# Allegro board CUITBIKE_V1.2_MSP430.brd
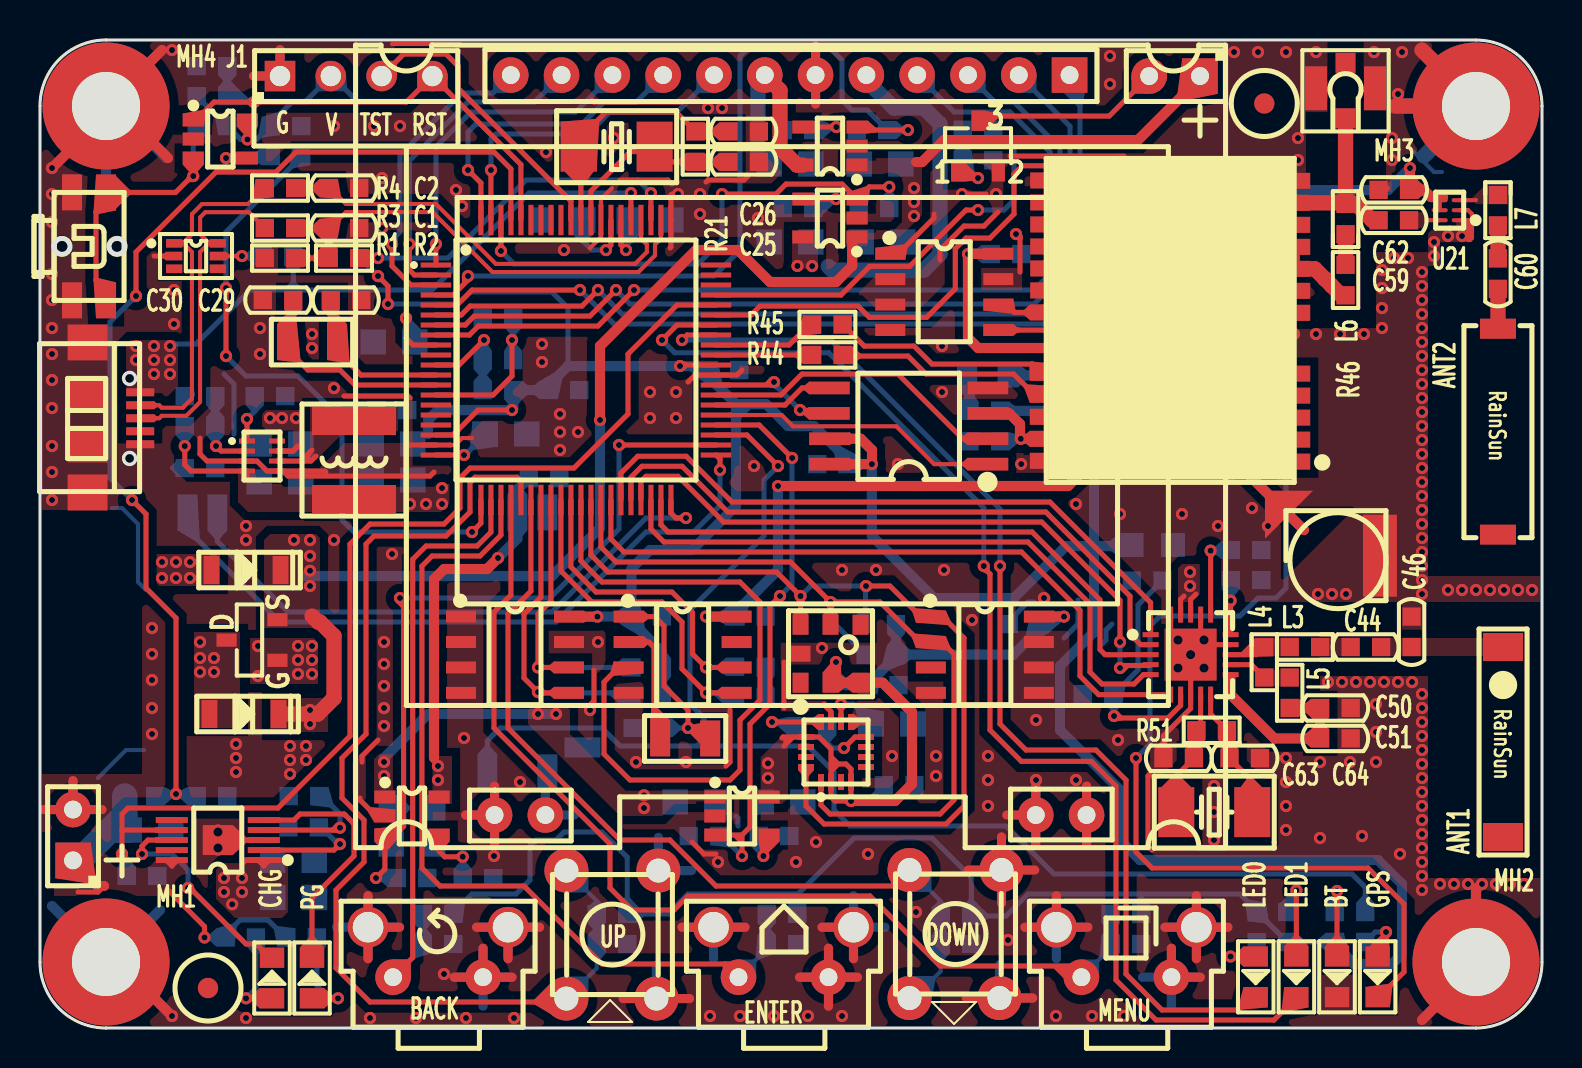
[diagram p0: board, top side]
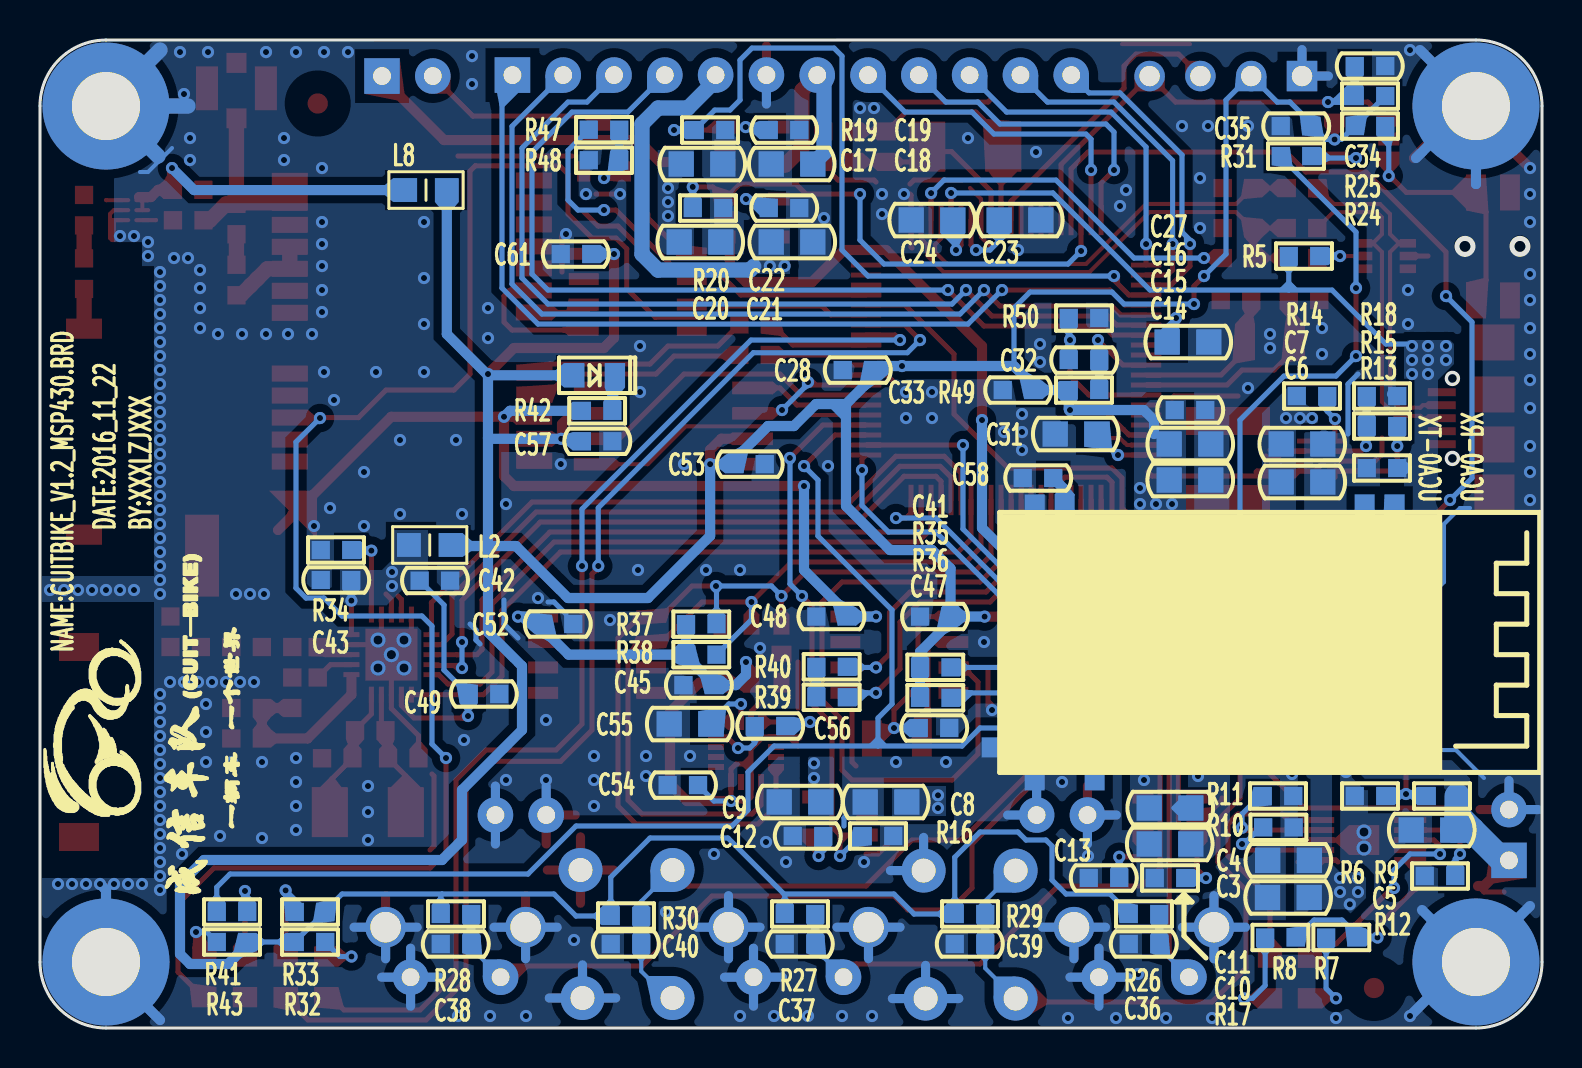
[diagram p1: board, bottom side, seen from below]

Outline 75.1 x 49.4 mm; copper layers: TOP, BOTTOM. Coordinates in mm from the lower left corner of the outline.
Outline path: 0,46.1 arc(0.97,48.44) 3.3,49.4 71.8,49.4 arc(74.13,48.43) 75.1,46.1 75.1,3.3 arc(74.13,0.97) 71.8,0 3.3,0 arc(0.97,0.97) 0,3.3 0,46.1

## Design rules (mm)
net group DP1: nets DM DP
net group DP2: nets D+ D-

## Placement (name value [footprint] x y rotation side)
ANT1  -  [AN9520-245]  73.15 19.05 270 top
ANT2  GPS1003-1575  [AN1003-1575]  72.9 29.72 270 top
B1  BEEP_HC12085P  [HEADER2X1_2R54]  58 47.6 180 top
BAT1  BATTERY  [HEADER2X1_2R54]  1.65 8.38 90 top
C1  10pF_50V  [CC0603]  15.2 40 180 top
C2  10pF_50V  [CC0603]  15.2 42 180 top
C3  10uF_25V  [CC0805]  12.68 6.53 0 bottom
C4  10uF_25V  [CC0805]  12.67 8.38 0 bottom
C5  10uF_25V  [CC0805]  5.5 9.9 0 bottom
C6  10uF_25V  [CC0805]  12 27.3 180 bottom
C7  10uF_25V  [CC0805]  12 29.2 180 bottom
C8  10uF_25V  [CC0805]  32.8 11.3 0 bottom
C9  10uF_25V  [CC0805]  37.1 11.3 0 bottom
C10  10uF_25V  [CC0805]  18.6 9.2 0 bottom
C11  10uF_25V  [CC0805]  18.6 11 180 bottom
C12  22nF_50V  [CC0603]  36.7 9.6 0 bottom
C13  22nF_50V  [CC0603]  21.9 7.5 0 bottom
C14  10uF_25V  [CC0805]  17.6 27.4 180 bottom
C15  10uF_25V  [CC0805]  17.6 29.2 180 bottom
C16  0.1uF_50V  [CC0603]  17.6 30.9 180 bottom
C17  10uF_25V  [CC0805]  42 43.2 180 bottom
C18  10uF_25V  [CC0805]  37.5 43.2 0 bottom
C19  22nF_50V  [CC0603]  37.9 44.9 180 bottom
C20  10uF_25V  [CC0805]  42.1 39.3 180 bottom
C21  10uF_25V  [CC0805]  37.5 39.3 180 bottom
C22  22nF_50V  [CC0603]  37.9 41 180 bottom
C23  10uF_25V  [CC0805]  26.1 40.4 0 bottom
C24  10uF_25V  [CC0805]  30.5 40.4 180 bottom
C25  20pF_50V  [CC0603]  35.18 43.31 180 top
C26  20pF_50V  [CC0603]  35.18 44.83 180 top
C27  10uF_25V  [CC0805]  17.7 34.3 180 bottom
C28  0.1uF_50V  [CC0603]  34.2 32.9 0 bottom
C29  12pF_50V  [CC0603]  15.3 36.4 180 top
C30  12pF_50V  [CC0603]  11.9 36.4 0 top
C31  10uF_25V  [CC0805]  23.3 29.7 0 bottom
C32  0.1uF_50V  [CC0603]  22.9 33.4 180 bottom
C33  0.1uF_50V  [CC0603]  26.2 31.9 180 bottom
C34  1nF_50V  [CC0603]  8.6 48.1 0 bottom
C35  0.1uF_50V  [CC0603]  12.3 45.1 180 bottom
C36  0.1uF_50V  [CC0603]  19.9 4.2 0 bottom
C37  0.1uF_50V  [CC0603]  37.1 4.2 0 bottom
C38  0.1uF_50V  [CC0603]  54.3 4.2 0 bottom
C39  0.1uF_50V  [CC0603]  28.6 4.2 0 bottom
C40  0.1uF_50V  [CC0603]  45.8 4.2 0 bottom
C41  0.1uF_50V  [CC0603]  30.34 20.57 0 bottom
C42  0.1uF_50V  [CC0603]  55.36 22.37 180 bottom
C43  0.1uF_50V  [CC0603]  60.3 22.4 180 bottom
C44  1.5pF_50V  [CC0603]  66.29 19.05 180 top
C45  0.1uF_50V  [CC0603]  42.16 17.14 180 bottom
C46  1pF_50V  [CC0603]  68.58 19.81 270 top
C47  12pF_50V  [CC0603]  30.4 15 180 bottom
C48  0.1uF_50V  [CC0603]  35.52 20.57 0 bottom
C49  0.1uF_50V  [CC0603]  52.9 16.7 0 bottom
C50  2.2nF_50V  [CC0603]  64.77 16 180 top
C51  4.7pF_50V  [CC0603]  64.77 14.48 180 top
C52  0.1uF_50V  [CC0603]  49.2 20.2 0 bottom
C53  0.1uF_50V  [CC0603]  39.62 28.19 180 bottom
C54  0.1uF_50V  [CC0603]  42.96 12.14 180 bottom
C55  10uF_25V  [CC0805]  42.6 15.2 0 bottom
C56  220nF_50V  [CC0603]  38.6 15.1 180 bottom
C57  0.1uF_50V  [CC0603]  47.24 29.34 180 bottom
C58  0.1uF_50V  [CC0603]  25.2 27.5 180 bottom
C59  8.2pF_50V  [CC0603]  67.69 40.39 180 top
C60  470pF_50V  [CC0603]  72.9 37.72 90 top
C61  0.1uF_50V  [CC0603]  48.3 38.7 0 bottom
C62  0.1uF_50V  [CC0603]  67.69 41.91 0 top
C63  20pF_50V  [CC0603]  56.93 13.49 0 top
C64  20pF_50V  [CC0603]  60.24 13.49 180 top
D1  LED_RED  [LED0805]  11.6 2.5 90 top
D2  LED_GREEN  [LED0805]  13.6 2.5 90 top
D3  LMBR120FT1G_SOD-123  [SOD-123]  8.6 15.7 0 top
D4  LMBR120FT1G_SOD-123  [SOD-123]  8.7 22.9 0 top
D5  LED_RED  [LED0805]  60.79 2.56 270 top
D6  LED_RED  [LED0805]  62.82 2.56 270 top
D7  LED_RED  [LED0805]  64.85 2.56 270 top
D8  LED_RED  [LED0805]  66.88 2.56 270 top
D9  RLS4148  [0805F]  47.37 32.64 180 bottom
IPX1  IPEX  [IPEX3]  65.28 46.99 0 top
J1  -  [HEADER4X1_2R54]  12 47.6 0 top
L1  SWPA5020S1R5MT  [L5020]  15.7 28.4 270 top
L2  BEAD_BLM21PG600  [LC0805]  55.61 24.15 0 bottom
L3  3.9nH  [LC0603]  63.25 19.05 0 top
L4  8.2nH  [LC0603]  61.21 18.29 90 top
L5  2.7nH  [LC0603]  62.48 16.76 270 top
L6  27nH  [LC0603]  65.28 40.45 270 top
L7  6.8nH  [LC0603]  72.9 40.89 90 top
L8  BEAD_BLM21PG600  [LC0805]  55.8 41.9 180 bottom
MH1  Hold  [HOLD250D134]  3.3 3.3 0 top
MH2  Hold  [HOLD250D134]  71.8 3.3 0 top
MH3  Hold  [HOLD250D134]  71.8 46.1 0 top
MH4  Hold  [HOLD250D134]  3.3 46.1 0 top
MP1  MarkPoint  [MARKPOINT_R3]  8.4 2 0 top
MP2  MarkPoint  [MARKPOINT_R3]  61.21 46.23 0 top
NOREF  -  []  3.5 0 90 top
NOREF#2  -  []  0 3.8 0 top
Q1  AO3401A_SOT23_PMOS  [SOT23_GSD]  10.6 19.4 90 top
Q2  S8050_SOT23_NPN  [SOT23_123]  46.9 44.1 0 top
R1  1M  [RC0603]  12 38.5 0 top
R2  1.5K  [RC0603]  15.2 38.5 0 top
R3  27R  [RC0603]  12 40 0 top
R4  27R  [RC0603]  12 42 0 top
R5  10K  [RC0603]  11.9 38.6 0 bottom
R6  200K  [RC0603]  8.6 11.6 180 bottom
R7  1.5K  [RC0603]  10.03 4.53 180 bottom
R8  1.5K  [RC0603]  13.08 4.53 180 bottom
R9  200K  [RC0603]  5 11.6 180 bottom
R10  1K  [RC0603]  13.18 10.03 180 bottom
R11  2K  [RC0603]  13.2 11.6 180 bottom
R12  10K  [RC0603]  5.1 7.6 0 bottom
R13  1K00  [RC0603]  8 28 0 bottom
R14  0R  [RC0603]  11.5 31.6 180 bottom
R15  200K  [RC0603]  8 30.1 0 bottom
R16  10K  [RC0603]  33.2 9.6 180 bottom
R17  10K  [RC0603]  18.6 7.5 0 bottom
R18  44.2K  [RC0603]  8 31.6 180 bottom
R19  10K  [RC0603]  41.6 44.9 180 bottom
R20  10K  [RC0603]  41.7 41 180 bottom
R21  1M  [RC0603]  32.77 44.07 90 top
R24  10K  [RC0603]  8.6 45.1 180 bottom
R25  47K  [RC0603]  8.6 46.6 0 bottom
R26  10K  [RC0603]  19.9 5.7 180 bottom
R27  10K  [RC0603]  37.1 5.7 180 bottom
R28  10K  [RC0603]  54.3 5.7 180 bottom
R29  10K  [RC0603]  28.6 5.7 180 bottom
R30  10K  [RC0603]  45.8 5.6 180 bottom
R31  0R  [RC0603]  12.3 43.6 0 bottom
R32  1K  [RC0603]  61.6 4.3 180 bottom
R33  1K  [RC0603]  61.6 5.8 0 bottom
R34  22K  [RC0603]  60.3 23.9 0 bottom
R35  4.7K  [RC0603]  30.34 18.03 180 bottom
R36  4.7K  [RC0603]  30.34 16.51 180 bottom
R37  4.7K  [RC0603]  42.04 20.19 180 bottom
R38  4.7K  [RC0603]  42.04 18.67 180 bottom
R39  4.7K  [RC0603]  35.52 16.54 180 bottom
R40  4.7K  [RC0603]  35.52 18.06 180 bottom
R41  510R  [RC0603]  65.5 5.8 180 bottom
R42  120R  [RC0603]  47.24 30.86 0 bottom
R43  510R  [RC0603]  65.5 4.3 0 bottom
R44  510R  [RC0603]  39.37 33.66 180 top
R45  510R  [RC0603]  39.37 35.18 180 top
R46  10R  [RC0603]  65.28 37.4 270 top
R47  1K  [RC0603]  46.9 44.92 180 bottom
R48  10K  [RC0603]  46.9 43.39 180 bottom
R49  0R  [RC0603]  22.9 31.9 0 bottom
R50  0R  [RC0603]  22.9 35.5 180 bottom
R51  1M  [RC0603]  58.59 14.89 180 top
SW1  SW-6X6x6-L  [SW-6X6X6-L]  17.65 2.54 0 top
SW2  SW-6X6x6-L  [SW-6X6X6-L]  34.92 2.54 0 top
SW3  SW-6X6x6-L  [SW-6X6X6-L]  52.07 2.54 0 top
SW4  SW-6X6x6  [SW-6X6X6]  28.62 4.67 0 top
SW5  SW-6X6x6  [SW-6X6X6]  45.77 4.7 0 top
SW6  SW-4P-5R4x4R5  [SW-4P-5R4X4R5]  3.3 41.78 270 top
U1  NUP4202W1T2G  [SC-88]  7.8 38.6 0 top
U2  BQ24090DGQR  [HVSSOP-10]  8.89 9.4 90 top
U3  MP2162GQH-Z  [QFN-8]  11.1 28.6 0 top
U4  RT9193-33GB  [SOT23-5]  18.6 10.6 270 top
U5  RT9193-33GB  [SOT23-5]  35.1 10.6 270 top
U6  RT9193-33GB  [SOT23-5]  39.5 44.1 90 top
U7  RT9193-33GB  [SOT23-5]  39.5 40.5 90 top
U8  MSP430F5529IPN  [LQFP-80]  26.8 33.4 270 top
U9  TPS3823-33DBVR  [SOT23-5]  9.02 44.45 270 top
U10  -  [BMP180]  38.03 17.27 0 top
U11  AT24C512C-SSHD-T  [SOIC8]  23.75 18.67 270 top
U12  NRF24L01P-R  [TQFN-4X4-20]  57.53 18.67 0 top
U13  TMP75AIDR  [SOIC8]  47.24 18.67 270 top
U14  PCF8563T  [SOIC8]  32.13 18.67 270 top
U15  -  [JLX12864G-086]  23.55 47.62 0 top
U16  HMC5883L  [TQFN-3X3-16]  39.8 13.8 0 top
U17  W25Q128FVSIG  [SO-8-208]  43.43 30.1 90 top
U18  HC-06  [HC-06-MINI]  7.37 25.78 270 bottom
U19  -  [NEO-6M]  62.61 28.32 180 top
U20  BATTERY_XH414  [BAT-XH414HG]  64.9 23.37 90 top
U21  MAX2659ELT+T  [UDFN-6]  70.48 40.89 180 top
U22  AT24C32D-SSHM-T  [SOIC8]  45.21 36.81 270 top
USB1  -  [USB-MICRO]  5.08 30.48 270 top
X1  XTAL_8MHz_5032  [X-2P-5R0X3R2-SMD]  28.83 44.07 0 top
X2  XTAL_32768Hz_3215  [X-2P-3R2X1R5-SMD]  13.6 34.3 0 top
X4  XTAL_32768Hz_3215  [X-2P-3R2X1R5-SMD]  32.26 14.48 180 top
X5  XTAL_16MHz_5032  [X-2P-5R0X3R2-SMD]  58.71 10.79 180 top

## Library data of the parts
ANT1 ANT2 = AN9520-245
B1 = BEEP_HC12085P
BAT1 U20 = BATTERY
C1 C2 C12 C13 C16 C19 C22 C25 C26 C28-C30 C32 C33 C36-C54 C56-C64 = CAP NP
C3-C11 C14 C15 C17 C18 C20 C21 C23 C24 C27 C31 C34 C35 C55 = CAP NP_2
D1 D2 D5-D8 = LED_4
D3 D4 = DIODE13_0
D9 = DIODE13_7
IPX1 = IPEX_1
J1 = CON4
L1 = IND_BEAD_0805_600OHM_1
L2 L8 = IND_BEAD_0805_600OHM_200MA
L3-L7 = INDUCTOR
MH1-MH4 = Hold_1
MP1 MP2 = MarkPoint
Q1 = MOS-P
Q2 = L14G1/TO_1
R1-R21 R24-R51 = R_Generic
SW1-SW6 = SWITCH-SPST-4P
U1 = nup2202w1_D_2
U2 = BQ24090
U3 = MP2162GQH-Z
U4-U7 = SPX3819M5-L-1-2
U8 = MSP430F5529
U9 = TPS3823-33_0
U10 = BMP180
U11 U22 = AT24Cxx
U12 = NRF24L01
U13 = LM75A
U14 = PCF8563
U15 = JLX12864G-086
U16 = HMC5883
U17 = W25Qxx
U18 = HC-06
U19 = NEO-6M
U21 = MAX2659ELT+T
USB1 = USB-MICRO
X1 X2 X4 X5 = XTAL_5032_0

## Footprints (pads in the part's own frame, mm; a bottom-side part is the same pattern mirrored in y, then rotated)
0805F
  rect 1.016x1.219 smd: 1(-1.016,0) 2(1.016,0)
AN1003-1575
  rect 1x1.8 smd: 1(-5.25,0) 2(5.05,0)
AN9520-245
  rect 1.4x2 smd: 1(0,0) 2(9.5,0)
BAT-XH414HG
  custom 2.4x2.4 smd: 1(2.3,2.45)
  rect 4.1x1.7 smd: 2(0.25,-2.1)
BMP180
  rect 0.8x1 smd: 1(0,0) 2(1.5,0) 3(3,0) 4(3,2.9) 5(1.5,2.9) 6(0,2.9)
  rect 1x0.8 smd: 7(0,1.45)
CC0603
  rect 0.914x0.914 smd: 1(-0.762,0) 2(0.762,0)
CC0805
  rect 1.27x1.27 smd: 1(-1.041,0) 2(1.041,0)
HC-06-MINI
  rect 1.8x1 smd: 1(0,0) 2(0,-1.5) 12(0,-16.5) 13(0,-18) 22(13,-18) 24(13,-15)
  rect 1x1.8 smd: 21(11.75,-19.75)
HEADER2X1_2R54
  rect 1.778x1.778 hole 0.889: 1(0,0)
  round 1.778 hole 0.889: 2(2.54,0)
HEADER4X1_2R54
  rect 1.524x1.524 hole 1.016: 1(0,0)
  round 1.524 hole 1.016: 2(2.54,0) 3(5.08,0) 4(7.62,0)
HOLD250D134
  round 6.35 hole 3.404: 1(0,0)
HVSSOP-10
  rect 0.3x1.6 smd: 1(-1,-2.3) 2(-0.5,-2.3) 3(0,-2.3) 4(0.5,-2.3) 5(1,-2.3) 6(1,2.3) 7(0.5,2.3) 8(0,2.3) 9(-0.5,2.3) 10(-1,2.3)
  rect 1.5x1.5 smd: 11(0,0)
IPEX3
  rect 1x1 smd: 1(0,-1.501) 3(0,1.27)
  rect 1.1x2.2 smd: 2(1.473,0) 4(-1.473,0)
JLX12864G-086
  rect 1.778x1.778 hole 0.889: 1(27.93,0.024)
  round 1.778 hole 0.889: 2(25.39,0.024) 3(22.85,0.024) 4(20.31,0.024) 5(17.77,0.024) 6(15.23,0.024) 7(12.69,0.024) 8(10.15,0.024) 9(7.61,0.024) 10(5.07,0.024) 11(2.53,0.024) 12(-0.01,0.024) 13(-0.82,-36.976) 14(1.72,-36.976) 15(26.24,-36.976) 16(28.78,-36.976)
L5020
  rect 1.4x4.2 smd: 1(-1.95,0) 2(1.95,0)
LC0603
  rect 0.914x0.914 smd: 1(-0.762,0) 2(0.762,0)
LC0805
  rect 1.194x1.194 smd: 1(-1.041,0) 2(1.041,0)
LED0805
  rect 1.016x1.219 smd: 1(-1.016,0) 2(1.016,0)
LQFP-80
  rect 0.25x1.52 smd: 1(-4.75,-7) 2(-4.25,-7) 3(-3.75,-7) 4(-3.25,-7) 5(-2.75,-7) 6(-2.25,-7) 7(-1.75,-7) 8(-1.25,-7) 9(-0.75,-7) 10(-0.25,-7) 11(0.25,-7) 12(0.75,-7) 13(1.25,-7) 14(1.75,-7) 15(2.25,-7) 16(2.75,-7) 17(3.25,-7) 18(3.75,-7) 19(4.25,-7) 20(4.75,-7) 41(4.75,7) 42(4.25,7) 43(3.75,7) 44(3.25,7) 45(2.75,7) 46(2.25,7) 47(1.75,7) 48(1.25,7) 49(0.75,7) 50(0.25,7) 51(-0.25,7) 52(-0.75,7) 53(-1.25,7) 54(-1.75,7) 55(-2.25,7) 56(-2.75,7) 57(-3.25,7) 58(-3.75,7) 59(-4.25,7) 60(-4.75,7)
  rect 1.52x0.25 smd: 21(7,-4.75) 22(7,-4.25) 23(7,-3.75) 24(7,-3.25) 25(7,-2.75) 26(7,-2.25) 27(7,-1.75) 28(7,-1.25) 29(7,-0.75) 30(7,-0.25) 31(7,0.25) 32(7,0.75) 33(7,1.25) 34(7,1.75) 35(7,2.25) 36(7,2.75) 37(7,3.25) 38(7,3.75) 39(7,4.25) 40(7,4.75) 61(-7,4.75) 62(-7,4.25) 63(-7,3.75) 64(-7,3.25) 65(-7,2.75) 66(-7,2.25) 67(-7,1.75) 68(-7,1.25) 69(-7,0.75) 70(-7,0.25) 71(-7,-0.25) 72(-7,-0.75) 73(-7,-1.25) 74(-7,-1.75) 75(-7,-2.25) 76(-7,-2.75) 77(-7,-3.25) 78(-7,-3.75) 79(-7,-4.25) 80(-7,-4.75)
MARKPOINT_R3
  round 1.016 smd: 1(0,0)
NEO-6M
  rect 1.8x0.8 smd: 1(0,0) 2(0,-1.1) 3(0,-2.2) 4(0,-3.3) 5(0,-4.4) 6(0,-7.44) 7(0,-8.54) 8(0,-9.64) 9(0,-10.74) 10(0,-11.84) 11(0,-12.94) 12(0,-14.04) 13(12.2,-14.06) 14(12.2,-12.96) 15(12.2,-11.86) 16(12.2,-10.76) 17(12.2,-9.66) 18(12.2,-8.56) 19(12.2,-7.46) 20(12.22,-4.44) 21(12.22,-3.34) 22(12.22,-2.24) 23(12.22,-1.14) 24(12.22,-0.04)
QFN-8
  rect 0.8x0.25 smd: 1(-0.75,0.75) 2(-0.75,0.25) 3(-0.75,-0.25) 4(-0.75,-0.75) 5(0.75,-0.75) 6(0.75,-0.25) 7(0.75,0.25) 8(0.75,0.75)
RC0603
  rect 0.914x0.914 smd: 1(-0.762,0) 2(0.762,0)
SC-88
  rect 0.813x0.432 smd: 1(-1.092,0.635) 2(-1.092,0) 3(-1.092,-0.635) 4(1.092,-0.635) 5(1.092,0) 6(1.092,0.635)
SO-8-208
  rect 0.635x2.032 smd: 1(-1.905,-3.962) 2(-0.635,-3.962) 3(0.635,-3.962) 4(1.905,-3.962) 5(1.905,3.962) 6(0.635,3.962) 7(-0.635,3.962) 8(-1.905,3.962)
SOD-123
  rect 0.8x1.4 smd: 1(-0.127,0) 2(3.327,0)
SOIC8
  rect 0.6x1.5 smd: 1(-1.9,-2.7) 2(-0.63,-2.7) 3(0.64,-2.7) 4(1.91,-2.7) 5(1.91,2.7) 6(0.64,2.7) 7(-0.63,2.7) 8(-1.9,2.7)
SOT23-5
  rect 0.65x1.06 smd: 1(-0.95,-1.354) 2(0,-1.354) 3(0.95,-1.354) 4(0.95,1.354) 5(-0.95,1.354)
SOT23_123
  rect 0.66x1.016 smd: 1(-1.016,-1.27) 2(1.016,-1.27) 3(0,1.27)
SOT23_GSD
  rect 0.66x1.016 smd: 1(-1.016,-1.27) 2(1.016,-1.27) 3(0,1.27)
SW-4P-5R4X4R5
  rect 1.8x1 smd: 1(0,0) 2(5.4,0) 3(0,-1.7) 4(5.4,-1.7)
SW-6X6X6
  round 2.2 hole 1.2: 1(-2.3,3.2) 2(-2.3,-3.2) 3(2.3,3.2) 4(2.2,-3.2)
SW-6X6X6-L
  round 2.032 hole 1.524: 1(-1.25,2.5) 4(5.75,2.5)
  round 1.778 hole 0.889: 2(0,0) 3(4.5,0)
TQFN-3X3-16
  rect 0.3x0.8 smd: 1(-0.75,-1.5) 2(-0.25,-1.5) 3(0.25,-1.5) 4(0.75,-1.5) 9(0.75,1.5) 10(0.25,1.5) 11(-0.25,1.5) 12(-0.75,1.5)
  rect 0.8x0.3 smd: 5(1.5,-0.75) 6(1.5,-0.25) 7(1.5,0.25) 8(1.5,0.75) 13(-1.5,0.75) 14(-1.5,0.25) 15(-1.5,-0.25) 16(-1.5,-0.75)
TQFN-4X4-20
  rect 0.8x0.25 smd: 1(-2,1) 2(-2,0.5) 3(-2,0) 4(-2,-0.5) 5(-2,-1) 11(2,-1) 12(2,-0.5) 13(2,0) 14(2,0.5) 15(2,1)
  rect 0.25x0.8 smd: 6(-1,-2) 7(-0.5,-2) 8(0,-2) 9(0.5,-2) 10(1,-2) 16(1,2) 17(0.5,2) 18(0,2) 19(-0.5,2) 20(-1,2)
  rect 2.6x2.6 smd: 21(0,0)
UDFN-6
  oval 0.8x0.2 smd: 1(-0.5,0.5) 2(-0.5,0) 3(-0.5,-0.5) 4(0.5,-0.5) 5(0.5,0) 6(0.5,0.5)
USB-MICRO
  rect 0.4x1.4 smd: 1(-1.31,-0.07) 2(-0.66,-0.07) 3(-0.01,-0.07) 4(0.64,-0.07) 5(1.29,-0.07)
  rect 1.8x2 smd: 6(-3.8,-2.7) 7(-1.2,-2.7) 8(1.3,-2.7) 9(3.7,-2.7)
X-2P-3R2X1R5-SMD
  rect 1x1.8 smd: 1(-1.25,0) 2(1.25,0)
X-2P-5R0X3R2-SMD
  rect 1.8x2.5 smd: 1(-1.9,0) 2(1.9,0)

## Nets
AVCC: C32.2 R49.1 U8.11(AVCC1)
GND: BAT1.2 C1.1 C2.1 C3.2 C4.2 C5.2 C6.2 C7.2 C8.2 C9.2 C10.2 C11.2 C12.2 C13.2 C14.2 C15.2 C16.2 C17.2 C18.2 C19.2 C20.2 C21.2 C22.2 C23.1 C24.1 C25.1 C26.1 C27.2 C28.2 C29.1 C30.1 C31.2 C33.1 C34.1 C35.1 C36.2 C37.2 C38.2 C39.2 C40.2 C41.2 C42.2 C43.1 C45.1 C46.1 C47.2 C48.2 C49.1 C50.1 C51.1 C52.1 C53.2 C54.1 C55.2 C57.2 C58.1 C61.2 C62.1 C63.1 C64.1 D7.2(CATHODE) IPX1.2 IPX1.4 J1.1 MH1.1 MH2.1 MH3.1 MH4.1 Q2.2(E) R1.1 R6.1 R10.2 R11.2 R12.2 R13.2 R16.2 R17.2 R18.2 R19.2 R20.2 R34.2 R48.1 R50.2 SW1.1 SW1.3 SW1.4 SW2.1 SW2.3 SW2.4 SW3.1 SW3.3 SW3.4 SW4.3 SW4.4 SW5.3 SW5.4 SW6.3 SW6.4 U1.2 U2.3(VSS) U2.11(GND) U3.3(AGND) U3.5(PGND) U4.2(GND) U5.2(GND) U6.2(GND) U7.2(GND) U8.19(DVSS1) U8.49(DVSS2) U8.61(VSSU) U8.68(AVSS2) U9.2(GND) U10.7(GND) U11.1(A0) U11.2(A1) U11.3(A2) U11.4(GND) U11.7(WP) U12.8(VSS_1) U12.14(VSS_2) U12.17(VSS_3) U12.20(VSS_4) U12.21(GND) U13.4(GND) U13.5(A2) U13.6(A1) U13.7(A0) U14.4(VSS) U15.6(VSS) U15.13(NC_4) U15.14(NC_3) U15.15(NC_2) U15.16(NC_1) U16.9(GND_1) U16.11(GND_2) U17.4(GND) U18.13(GND_1) U18.21(GND_2) U18.22(GND_3) U19.7(VDDUSB) U19.10(GND_1) U19.12(GND_2) U19.13(GND_3) U19.24(GND_4) U20.2 U21.1(GND_1) U21.2(GND_2) U22.1(A0) U22.2(A1) U22.3(A2) U22.4(GND) U22.7(WP) USB1.5(GND) USB1.6(P_2) USB1.7(P_1) USB1.8(P_3) USB1.9(P_4)
VBAT: BAT1.1 C5.1 D3.1 Q1.3(D) R7.2 R8.2 R9.2 U2.10(OUT)
VBUS: C3.1 C4.1 D4.1 Q1.1(G) R5.2 R13.1 U2.1(IN) U8.65(VBUS) USB1.1(VBUS)
VCC1_3V3: R39.1 R40.1
VCC_3V3: C14.1 C15.1 C16.1 C28.1 C33.2 C35.2 C41.1 C53.1 C57.1 C61.1 D9.1(ANODE) J1.2 L1.2(B) L2.1(A) L8.2(B) R15.1 R24.1 R25.1 R26.1 R27.1 R28.1 R29.1 R30.1 R32.1 R33.1 R35.1 R36.1 R43.1 R49.2 U3.4(OUT) U8.18(DVCC1) U8.50(DVCC2) U9.5(VCC) U11.8(VCC) U17.3(W\P\) U17.7(H\O\L\D\) U17.8(VCC) U19.23(VCC) U22.8(VCC)
VCC_BKUP: C48.1 R42.2 U14.8(VDD) U19.22(V_BCKP) U20.1
VCC_BT: C11.1 C58.2 U4.5(VOUT) U18.12(3.3V)
VCC_IN: B1.1(P) C6.1 C7.1 C8.1 C10.1 C17.1 C20.1 D3.2 D4.2 Q1.2(S) R14.1 U3.7(VIN) U4.1(VIN) U5.1(VIN) U6.1(VIN) U7.1(VIN)
VCC_LCD: C18.1 U6.5(VOUT) U15.7(VDD)
VCC_LEDA: C21.1 U7.5(VOUT) U15.5(LEDA)
VCC_SENSOR: C9.1 C45.2 C52.2 C54.2 R37.1 R38.1 U5.5(VOUT) U10.2(VDD) U10.3(VDDIO) U13.8(VCC) U16.2(VDD) U16.4(S1) U16.13(VDDIO)
VSSA: C32.1 R50.1 U8.14(AVSS1)
12864_CS: U8.3(P6.6/CB6/A6) U15.12(CS)
12864_EN: R19.1 U6.3(EN) U8.4(P6.7/CB7/A7)
12864_LEDA_EN: R20.1 U7.3(EN) U8.78(P6.1/CB1/A1)
12864_RESET: U8.2(P6.5/CB5/A5) U15.11(RESET)
12864_ROM_CS: U8.8(P7.3/CB11/A15) U15.4(ROM_CS)
12864_ROM_IN: U8.5(P7.0/CB8/A12) U15.1(ROM_IN)
12864_ROM_OUT: U8.6(P7.1/CB9/A13) U15.2(ROM_OUT)
12864_ROM_SCK: U8.7(P7.2/CB10/A14) U15.3(ROM_SCK)
12864_RS: U8.1(P6.4/CB4/A4) U15.10(RS)
12864_SCL: U8.79(P6.2/CB2/A2) U15.8(SCLK)
12864_SDA: U8.80(P6.3/CB3/A3) U15.9(SDA)
#RESET: C34.2 J1.4 R25.2 U8.76(R\S\T\/NMI/SBWTDIO) U9.1(R\E\S\E\T\)
ADC_BAT: R6.2 R9.1 U8.77(P6.0/CB0/A1)
AT24CXX_SCL: R35.2 U8.28(P1.7/TA1.0) U11.6(SCL)
AT24CXX_SDA: R36.2 U8.27(P1.6/TA1CLK/CBOUT) U11.5(SDA)
BAT_#CHG: D1.2(CATHODE) U2.8(C\H\G\)
BAT_#PG: D2.2(CATHODE) U2.5(P\G\)
BAT_ISET2: R12.1 U2.7(ISET2) U8.56(P5.7/TB0.1)
BEEP: R47.1 U8.57(P7.4/TB0.2)
BT_EN: R17.1 U4.3(EN) U8.42(P3.5/TB0.5)
BT_LED: R41.1 U8.43(P3.6/TB0.6) U18.24(PIO1)
D+: R3.1 U1.6 USB1.3(D+)
D-: R4.1 U1.1 USB1.2(D-)
DM: C2.2 R4.2 U8.64(PU.1/DM)
DP: C1.2 R1.2 R2.1 R3.2 U8.62(PU.0/DP)
GPS_PPS: D8.2(CATHODE) U8.55(P5.6/TB0.0) U19.3(TIMEPULSE)
GPS_SCL: U19.19(SCL2) U22.6(SCL)
GPS_SDA: U19.18(SDA2) U22.5(SDA)
IIC1_SCL: R38.2 U8.33(P2.4/TA2.1) U10.5(SCL) U13.2(SCL) U16.1(SCL)
IIC1_SDA: R37.2 U8.32(P2.3/TA2.0) U10.6(SDA) U13.1(SDA) U16.16(SDA)
NRF24L01_CE: U8.35(P2.6/RTCCLK/DMAE0) U12.1(CE)
NRF24L01_CSN: U8.36(P2.7/UCB0STE/UCA0CLK) U12.2(CSN)
NRF24L01_IRQ: U8.34(P2.5/TA2.2) U12.6(IRQ)
NRF24L01_MISO: U8.38(P3.1/UCB0SOMI/UCB0SCL) U12.5(MISO)
NRF24L01_MOSI: U8.37(P3.0/UCB0SIMO/UCB0SDA) U12.4(MOSI)
NRF24L01_SCK: U8.39(P3.2/UCB0CLK/UCA0STE) U12.3(SCK)
P1.0: R31.2 U8.21(P1.0/TA0CLK/ACLK)
P1.1: C36.1 R26.2 SW1.2 U8.22(P1.1/TA0.0)
P1.2: C37.1 R27.2 SW2.2 U8.23(P1.2/TA0.1)
P1.3: C38.1 R28.2 SW3.2 U8.24(P1.3/TA0.2)
P1.4: C39.1 R29.2 SW4.1 SW4.2 U8.25(P1.4/TA0.3)
P1.5: C40.1 R30.2 SW5.1 SW5.2 U8.26(P1.5/TA0.4)
P4.6: D5.2(CATHODE) U8.53(P4.6/PM_NONE)
P4.7: D6.2(CATHODE) U8.54(P4.7/PM_NONE)
PCF8563_#INT: U8.31(P2.2/TA2CLK/SMCLK) U14.3(I\N\T\)
PCF8563_SCL: R40.2 U8.30(P2.1/TA1.2) U14.6(SCL)
PCF8563_SDA: R39.2 U8.29(P2.0/TA1.1) U14.5(SDA)
SENSOR_EN: R16.1 U5.3(EN) U8.44(P3.7/TBOUTH/SVMOUT)
TEST: J1.3 U8.71(TEST/SBWTCK)
UCA0RXD: U8.41(P3.4/UCA0RXD/UCA0SOMI) U18.1(UART_TXD)
UCA0TXD: U8.40(P3.3/UCA0TXD/UCA0SIMO) U18.2(UART_RXD)
UCA1RXD: R45.2 U8.52(P4.5/PM_UCA1RXD/PM_UCA1SOMI)
UCA1TXD: R44.2 U8.51(P4.4/PM_UCA1TXD/PM_UCA1SIMO)
USB_PUR: R2.2 U8.63(PUR)
W25QXX_#CS: U8.45(P4.0/PM_UCB1STE/PM_UCA1CLK) U17.1(C\S\)
W25QXX_SPI_CLK: U8.48(P4.3/PM_UCB1CLK/PM_UCA1STE) U17.6(CLK)
W25QXX_SPI_MISO: U8.47(P4.2/PM_UCB1SOMI/PM_UCB1SCL) U17.2(DO)
W25QXX_SPI_MOSI: U8.46(P4.1/PM_UCB1SIMO/PM_UCB1SDA) U17.5(DI)
XIN: C29.2 U8.12(P5.4/XIN) X2.2
XOUT: C30.2 U8.13(P5.5/XOUT) X2.1
XT2IN: C25.2 R21.1 U8.69(P5.2/XT2IN) X1.2
XT2OUT: C26.2 R21.2 U8.70(P5.3/XT2OUT) X1.1
N16975: C47.1 U14.1(OSCI) X4.1
N20495: R34.1 U12.16(IREF)
N20883: C63.2 R51.2 U12.9(XC2) X5.2
N20890: C64.2 R51.1 U12.10(XC1) X5.1
N21363: C42.1 C43.2 C49.2 L2.2(B) U12.7(VDD_1) U12.15(VDD_2) U12.18(VDD_3) U12.19(DVDD)
N22760: L3.1 L4.2 U12.13(ANT2)
N22769: L4.1 L5.1 U12.12(ANT1)
N22838: C50.2 C51.2 L5.2 U12.11(VDD_PA)
N23293: ANT1.1 C44.1 C46.2
N49336: C31.1 U8.20(VCORE)
N50234: C23.2 U8.67(V18)
N138675: R44.1 U19.21(RXD1)
N138679: R45.1 U19.20(TXD1)
N211268: C24.2 U8.66(VUSB)
N213516: C59.2 IPX1.1 L6.1 U19.11(RF_IN)
N227281: C44.2 L3.2
N13728785: R10.1 U2.2(ISET)
N13728792: R11.1 U2.4(PRETERM)
N13730609: R14.2 U3.1(EN)
N13730742: L1.1(A) U3.6(SW)
N13730860: R15.2 R18.1 U3.2(FB)
N13731687: D2.1(ANODE) R8.1
N13731822: D1.1(ANODE) R7.1
N16749524: R5.1 U1.5
N16751988: R24.2 SW6.1 SW6.2 U9.3(M\R\)
N16752139: R31.1 U9.4(WDI)
N16756953: C27.1 U8.9(P5.0/A8/VREF+/VEREF+)
N16761282: D5.1(ANODE) R32.2
N16761286: D6.1(ANODE) R33.2
N16762618: C56.1 U16.8(SETP)
N16762626: C56.2 U16.12(SETC)
N16762634: C55.1 U16.10(C1)
N16777984: C12.1 U5.4(BYP)
N16778902: C19.1 U6.4(BYP)
N16779252: C22.1 U7.4(BYP)
N16779614: C13.1 U4.4(BYP)
N16780565: D7.1(ANODE) R41.2
N16782209: D8.1(ANODE) R43.2
N16782513: D9.2(CATHODE) R42.1
N16783927: R46.2 U19.8(NC_2) U19.9(VCC_RF)
N16783979: L6.2 R46.1
N16784737: ANT2.1 C60.1
N16784761: C60.2 L7.1
N16784764: L7.2 U21.3(RFIN)
N16785800: C59.1 U21.6(RFOUT)
N16785818: C62.2 L8.1(A) U21.4(VCC) U21.5(S\H\D\N\)
N16789326: U14.2(OSCO) X4.2
N16798201: Q2.1(B) R47.2 R48.2
N16798223: B1.2(G) Q2.3(C)

Pads without a net: ANT1 2; ANT2 2; IPX1 3; MP1 1; MP2 1; U1 3 4; U2 6 9; U3 8; U8 10 15 16 17 58 59 60 72 73 74 75; U10 1 4; U13 3; U14 7; U16 3 5 6 7 14 15; U19 1 2 4 5 6 14 15 16 17; USB1 4

## Via types
v1: diameter 0.61, hole 0.305, TOP to BOTTOM, 419 vias
v2: diameter 0.762, hole 0.457, TOP to BOTTOM, 7 vias

## Routing (per net, layer and track width the routed paths; a pad name or vN(x,y) marks a point on that pad's centre or on a via; arc(x,y) is an arc through that point)
AVCC: length 5.4
  TOP w0.254: v1(22.2,34.4) 20.95,33.15 U8.11
  BOTTOM w0.254: R49.1 C32.2 22.2,33.46 v1(22.2,34.4)
GND: length 346.3
  TOP w0.203: C62.1 67.31,41.91 67.4,42 ; 71.6,40.4 71.6,39.5 71.5,39.4 71.4,39.4 71.4,40.29 71.5,40.39 ; 71.6,40.4 71.59,40.39 71.5,40.39 ; 71.6,40.4 71.6,40.7 71.41,40.89 U21.2 ; 17.6,49.2 21,49.2 ; U8.19 20.75,29.15 20.86,29.26 20.87,29.26 21.11,29.5 21.6,29.5 ; 27.5,39 28.05,39.55 U8.68 28.05,41.45 28.6,42 ; U21.1 71.5,40.39
  TOP w0.254: 16.9,14.4 16.1,13.6 16.1,13.3 ; 14.3,27.8 14.25,27.85 12.15,27.85 ; 44.7,40.7 44.7,40.5 42.91,38.71 U22.1 ; U12.17 58.03,19.17 ; 58.03,19.17 U12.14 ; 58.03,19.17 v2(57.53,18.67) ; 48.5,43.6 54.2,43.6 ; 33.8,8.7 33.2,8.7 32.6,9.3 ; 12.15,27.85 12.4,27.6 19.5,27.6 19.7,27.8 ; 12.15,27.85 U3.5 11.35,27.85 10.85,28.35 U3.3 8.35,28.35 8,28.7 8,29.5 ; 49,39.5 49,39.6 48.9,39.6 ; 49,39.5 49,37.8 ; 49,39.5 48.9,39.6 ; 45,38.4 45,38.9 46.2,40.1 47.2,40.1 47.9,40.8 ; 41.3,15.4 41.2,15.3 U16.9 ; 35.1,32.9 34.85,32.65 U8.49 32.75,32.65 32.4,32.3 ; 37.2,18.3 37.2,16 ; v2(57.53,18.67) U12.8 57.53,15.98 56.17,14.62 C63.1 ; v2(57.53,18.67) 56.53,19.67 U12.20 ; U4.2 16.8,10.6 16,11.4 16,11.5 ; 31.5,39 31.55,39.05 U8.61 31.55,41.65 31.6,41.7 ; 46.4,41.7 47.3,41.7 ; 39.2,16.2 39.2,16.17 39.53,15.84 39.53,15.82 39.55,15.8 U16.11 ; 29,42.4 31.4,42.4 31.6,42.2 ; U1.2 5.7,38.6 ; 55.5,12.7 55.4,12.6 55.4,9.1 55.6,8.9 ; 18.5,31.5 18.4,31.6 15.2,31.6 ; U2.3 U2.11 ; 34.5,15.9 34.5,13.3 34.3,13.1 ; 27.7,17.9 27.7,16.1 v1(27.5,15.9) ; 48.9,39.6 v1(48.8,39.7) ; 32.1,46.3 27.7,46.3 27.6,46.4 ; 33.3,42.3 33.4,42.4 35.2,42.4 35.4,42.6 ; U8.19 18.45,29.15 18.4,29.2
  TOP w0.457: 52.33,9.2 U15.16 52.33,12.1 ; 39.42,1.09 SW2.3 ; SW2.3 40.87,2.54 ; SW2.3 37.98,2.54 ; SW2.3 39.42,3.99 ; 56.24,5.04 SW3.4 ; SW3.4 57.82,6.62 ; SW3.4 57.82,3.46 ; SW3.4 59.4,5.04 ; 49.24,5.04 SW3.1 ; SW3.1 50.82,6.62 ; SW3.1 52.4,5.04 ; 48.08,7.9 49.73,7.9 ; 48.08,7.9 46.42,7.9 ; 48.08,7.9 48.08,6.24 ; 48.08,7.9 48.08,9.56 ; SW1.3 23.6,2.54 ; SW1.3 20.7,2.54 ; SW1.3 22.15,3.99 ; SW1.4 24.98,5.04 ; SW1.4 23.4,3.46 ; SW1.4 21.83,5.04 ; 16.4,3.46 SW1.1 ; SW1.1 16.4,6.62 ; SW1.1 17.98,5.04 ; BAT1.2 3.1,10.92 ; BAT1.2 0.2,10.92 ; BAT1.2 1.65,12.37 ; U15.13 22.73,12.1 ; U15.13 21.28,10.65 ; U15.13 22.73,9.2 ; 48.34,10.65 U15.15 ; U15.15 49.79,9.2 ; U15.15 49.79,12.1 ; 32.48,1.47 SW4.4 29.16,1.47 ; 56.57,3.99 SW3.3 58.02,2.54 ; 38.78,49.1 U15.6 38.78,46.2 ; 12,48.92 J1.1 10.68,47.6 ; 40.67,3.46 SW2.4 39.1,5.04 ; 46.32,1.5 49.63,1.5 ; 32.1,5.04 SW2.1 35.25,5.04
  TOP w0.508: MH4.1 3.8,46.1 6.4,43.5 ; MH4.1 3.3,46.1 6.1,48.9 ; MH4.1 3.3,45.7 v1(0.6,43) ; 71.8,7 MH2.1 71.8,3.1 69.1,0.4 ; v1(6.6,0.6) 3.9,3.3 MH1.1
  TOP w0.762: 67.8,46.1 MH3.1 71.8,46.2 69.1,48.9
  BOTTOM w0.203: 5.2,13.9 4.3,13.9 2.9,12.5 ; 70.1,42.8 69.7,42.8 68.5,44 ; 5.3,21.9 4.9,22.3 4.9,25.2 4.1,26 3.6,26
  BOTTOM w0.254: 51.9,21.4 51.9,20.2 51.2,19.5 ; 53.6,20.2 53.3,19.9 53.3,19.4 53.1,19.2 ; C11.2 18.4,11 ; 49.7,21.3 49.4,21.3 48.8,20.7 ; 34.8,10.6 34.9,10.5 34.9,10.1 ; 9.7,29.7 9.7,32.2 9.2,32.7
  BOTTOM w0.457: SW2.1 35.25,5.04 ; SW2.1 33.67,3.46 ; SW2.1 32.1,5.04 ; 20.7,2.54 SW1.3 ; SW1.3 22.15,3.99 ; SW1.3 22.15,1.09 ; SW1.3 23.6,2.54 ; 47.98,1.5 47.98,3.16 ; 47.98,1.5 49.63,1.5 ; 47.98,1.5 46.32,1.5 ; 55.12,2.54 SW3.3 ; SW3.3 56.57,3.99 ; SW3.3 58.02,2.54 ; SW3.3 56.57,1.09 ; 23.4,3.46 SW1.4 ; SW1.4 24.98,5.04 ; SW1.4 21.83,5.04 ; 16.4,3.46 SW1.1 ; SW1.1 14.83,5.04 ; SW1.1 16.4,6.62 ; SW1.1 17.98,5.04 ; 37.98,2.54 SW2.3 ; SW2.3 39.42,1.09 ; SW2.3 40.87,2.54 ; SW2.3 39.42,3.99 ; 30.92,9.53 SW4.3 32.58,7.87 ; SW2.4 42.25,5.04 ; SW2.4 39.1,5.04 ; SW2.4 40.67,6.62 ; SW2.4 40.67,3.46 ; 25.27,12.1 U15.14 26.72,10.65 ; 49.24,5.04 SW3.1 ; SW3.1 52.4,5.04 ; SW3.1 50.82,3.46 ; SW4.4 32.48,1.47 ; SW4.4 29.16,1.47 ; SW4.4 30.82,3.13 ; 1.65,12.37 BAT1.2 0.2,10.92 ; 38.78,46.2 U15.6 ; 21.28,10.65 U15.13 22.73,9.2 ; 10.68,47.6 J1.1 12,48.92 ; 52.33,12.1 U15.16 52.33,9.2 ; SW3.4 59.4,5.04 ; SW3.4 57.82,3.46 ; SW3.4 56.24,5.04 ; U15.15 49.79,12.1
  BOTTOM w0.508: 6.3,43.5 3.7,46.1 MH4.1 ; MH4.1 3.3,46.1 6.1,48.9 ; MH4.1 3.3,42.2 3.3,42.2 ; v1(6.6,0.6) 3.9,3.3 3.4,3.3 ; 3.4,3.3 MH1.1 3.3,3.4 0.6,6.1 ; 3.4,3.3 6,5.9 ; v1(72.1,7.2) 71.8,6.9 MH2.1 71.8,3.1 69.1,0.4 ; R18.2 7.4,31.6 7.5,31.7
  BOTTOM w0.762: 67.7,46.1 71.7,46.1 ; 71.7,46.1 MH3.1 71.8,46.2 69.1,48.9 ; 71.7,46.1 69.2,43.6
  vias: v1(0.6,41.7) v1(0.6,40.3) v1(0.6,37.7) v1(0.6,36.4) v1(0.6,35) v1(0.6,33.7) v1(0.6,32.4) v1(0.6,31) v1(0.6,29.1) v1(0.6,27.8) v1(0.6,26.4) v1(5.6,20) v1(5.6,18.7) v1(5.6,17.4) v1(5.6,16) v1(5.6,14.7) v1(6.6,48.9) v1(6.7,36.9) v1(6.7,35.2) v1(9.8,14.2) v1(9.8,13.5) v1(9.8,12.8) v1(10.3,25.1) v1(10.3,24.4) v1(10.3,0.5) v1(11,35) v1(11,33.7) v1(12.5,14.1) v1(12.5,13.4) v1(12.5,12.7) v1(13.3,14.1) v1(13.3,13.4) v1(13.6,34.7) v1(13.6,34) v1(14.7,45.1) v1(14.7,32) v1(14.7,24.4) v1(16.5,0.5) v1(16.7,45.1) v1(17.1,42.5) v1(17.1,40) v1(17.2,19.3) v1(17.2,18.2) v1(17.2,17.1) v1(17.2,16) v1(17.2,15.1) v1(17.6,23.7) v1(18,45.1) v1(18.8,0.5) v1(20.2,2.7) v1(20.8,41.9) v1(21.1,41.1) v1(21.2,14.5) v1(21.3,0.5) v1(22.7,8.6) v1(23.7,0.5) v1(24,12.3) v1(25.1,34.2) v1(25.1,33.3) v1(25.3,43.8) v1(26,30.7) v1(26,29.8) v1(26,28.9) v1(26.2,38.9) v1(26.9,29.8) v1(27.9,19.3) v1(28.7,44.5) v1(29.8,13.3) v1(30.5,31.8) v1(30.5,30.5) v1(31.8,31.8) v1(31.8,30.5) v1(31.9,41.7) v1(32.3,13.3) v1(33,41.7) v1(33,40.7) v1(33.4,46) v1(33.5,0.6) v1(33.9,8.3) v1(34.1,46) v1(35,0.6) v1(35.7,28.1) v1(35.9,40.5) v1(36.7,0.6) v1(37.8,8.3) v1(38.4,0.6) v1(38.8,9.3) v1(39.1,19) v1(40.1,22.9) v1(40.1,0.6) v1(41.4,8.7) v1(41.8,22.9) v1(42.6,13.6) v1(42.9,28.2) v1(43.8,5.8) v1(44.8,13.6) v1(44.8,12.6) v1(45.1,34.1) v1(45.1,31.8) v1(45.2,22.9) v1(46.1,41.7) v1(46.6,20.4) v1(47.4,13.6) v1(47.4,12.4) v1(47.4,11.1) v1(47.8,41.7) v1(48.4,4.4) v1(49.06,28.2) v1(49.8,15.4) v1(49.8,12.4) v1(50.2,21.5) v1(50.8,0.6) v1(51.8,26.2) v1(51.8,12.4) v1(52.6,0.6) v1(52.7,36) v1(52.7,34.5) v1(53.5,48.6) v1(53.5,47.2) v1(53.9,14.4) v1(54,25.7) v1(54.2,0.6) v1(54.3,29.4) v1(55.9,40.3) v1(55.9,37.5) v1(55.9,35.2) v1(55.9,32.8) v1(57.1,29.4) v1(57.1,25.7) v1(58.3,32.8) v1(58.7,12.1) v1(58.7,10.8) v1(58.7,9.4) v1(58.9,27.8) v1(58.9,25.1) v1(59.7,48.8) v1(60.4,31.4) v1(60.6,26) v1(60.9,48.8) v1(60.9,32.8) v1(61,43) v1(61,40.3) v1(61,39.2) v1(61,38.1) v1(61,36.9) v1(61,35.8) v1(61.4,25.1) v1(61.5,34.7) v1(62.3,48.8) v1(62.3,13.5) v1(62.3,12.3) v1(62.3,11.1) v1(62.3,9.9) v1(62.7,34.7) v1(62.9,44.5) v1(62.9,43.4) v1(63.8,48.8) v1(63.8,34.7) v1(63.9,21.7) v1(64,13.3) v1(64,9.5) v1(64.4,17.3) v1(64.6,21.7) v1(65,34.7) v1(65.1,17.3) v1(65.3,21.7) v1(65.5,13.3) v1(65.8,17.3) v1(66.1,9.6) v1(66.2,34.7) v1(66.5,17.3) v1(66.7,48.8) v1(66.8,16.2) v1(66.8,14.8) v1(66.8,13.3) v1(67.1,37.9) v1(67.1,37) v1(67.1,36) v1(67.1,35) v1(67.2,17.3) v1(67.6,44.5) v1(67.6,43.4) v1(67.7,38.5) v1(67.9,46.7) v1(67.9,17.3) v1(68,8.7) v1(68.1,48.8) v1(68.4,38.5) v1(68.6,17.3) v1(69.1,37.8) v1(69.1,37.1) v1(69.1,36.4) v1(69.1,35.7) v1(69.1,35) v1(69.1,34.3) v1(69.1,33.6) v1(69.1,32.9) v1(69.1,32.2) v1(69.1,31.5) v1(69.1,30.8) v1(69.1,30.1) v1(69.1,29.4) v1(69.1,28.7) v1(69.1,28) v1(69.1,27.3) v1(69.1,26.6) v1(69.1,25.9) v1(69.1,25.2) v1(69.1,24.5) v1(69.1,23.8) v1(69.1,23.1) v1(69.1,22.4) v1(69.1,21.7) v1(69.1,16.7) v1(69.1,16) v1(69.1,15.3) v1(69.1,14.6) v1(69.1,13.9) v1(69.1,13.2) v1(69.1,12.5) v1(69.1,11.8) v1(69.1,11.1) v1(69.1,10.4) v1(69.1,9.7) v1(69.1,9) v1(69.1,8.3) v1(69.1,7.6) v1(69.1,6.9) v1(69.7,39.3) v1(69.7,38.6) v1(70,7.2) v1(70.4,39.6) v1(70.4,21.9) v1(70.7,7.2) v1(71.1,39.6) v1(71.1,21.9) v1(71.4,7.2) v1(71.8,21.9) v1(72.5,21.9) v1(72.8,7.2) v1(73.2,21.9) v1(73.5,7.2) v1(73.9,21.9) v1(74.2,7.2) v1(74.6,21.9) v2(8.9,9.8) v2(8.9,9) v2(56.9,19.4) v2(56.9,18) v2(58.2,19.4) v2(58.2,18)
VBAT: length 18.2
  TOP w0.203: 6.3,6.9 6.4,6.9
  TOP w0.254: 6.4,6.9 8.23,5.07 v1(8.23,4.53) ; 3.2,7.1 2.9,6.8 1.9,6.8 ; U2.10 6.59,8.11 6.6,8.1
  TOP w0.508: 3.2,7.1 2.9,7.1 1.65,8.35 BAT1.1
  BOTTOM w0.203: 9.27,4.53 v1(8.23,4.53)
  BOTTOM w0.254: 12.32,4.53 12.27,4.53 11.4,5.4 10,5.4 9.27,4.67 9.27,4.53
  BOTTOM w1.27: 4.24,10.64 3.5,9.9 ; 4.24,10.64 4.24,10.12 C5.1 3.5,9.9 ; 4.24,10.64 R9.2 ; 3.5,9.9 1.98,8.38 BAT1.1
  vias: v1(8,19.3) v1(8,18.5) v1(8,17.8) v1(8.7,18.5) v1(8.7,17.8)
VBUS: length 32.3
  TOP w0.254: 12.2,8.3 12.1,8.4 U2.1 ; 10.2,8.3 10.3,8.4 U2.1 ; 11.2,8.1 11.19,8.11 U2.1 ; U8.65 v1(29.55,41.75)
  BOTTOM w0.203: R13.1 6.6,28
  BOTTOM w0.254: v1(6.5,34.1) 6.6,34.2 7.8,34.2 10.5,36.9 12.66,36.9 ; 12.66,36.9 19.6,36.9 24.45,41.75 v1(29.55,41.75) ; 12.66,36.9 R5.2
  vias: v1(4.8,34.1) v1(4.8,33.4) v1(5.7,34.1) v1(5.7,33.4) v1(5.7,32.7) v1(6.1,23.3) v1(6.1,22.5) v1(6.5,33.4) v1(6.5,32.7) v1(6.8,23.3) v1(6.8,22.5) v1(7.5,23.3) v1(7.5,22.5) v1(9.2,7.5) v1(9.2,6.8) v1(9.61,6.19) v1(10.1,7.5) v1(10.1,6.8) v1(10.9,19.1) v1(10.9,17.6) v1(12.9,19.1) v1(12.9,18.4) v1(12.9,17.7) v1(13.6,19.1) v1(13.6,18.4) v1(13.6,17.7)
VCC1_3V3: length 1.5
  BOTTOM w0.508: R39.1 R40.1
VCC_3V3: length 262.7
  TOP w0.254: v1(16.9,37.6) 17.4,37.1 v1(17.4,36.2) ; 10.37,45.4 v1(10.37,44.43) ; 10.4,27.5 10.35,27.55 U3.4 7.55,27.85 7.24,28.16 v1(7.24,29.1) ; v1(23.6,30.9) 21.9,30.9 20.93,29.93 20.93,29.93 20.69,29.7 20.69,29.7 20.64,29.65 U8.18 ; U8.50 32.05,33.15 v1(32,33.1)
  TOP w0.508: 50.39,29.46 v1(49.04,29.46) 49,29.5 49,30.2 48.47,30.73 U17.3 ; U17.7 41.04,29.46 41.6,28.9 41.6,28.2 v1(41.59,28.19) U17.8 ; U11.8 v1(27.87,20.57) ; U22.8 46.41,38.71 v1(46.4,38.7) 46.4,34.51 46.91,34 51.4,34 v1(52.7,32.7)
  BOTTOM w0.254: R25.1 9.34,45.1 R24.1 10.03,44.43 v1(10.37,44.43) 10.83,44.43 11.5,45.1 C35.2 11.54,45.24 12.6,46.3 13.24,46.3 J1.2 14.6,47.6 15.8,46.4 15.8,38.7 v1(16.9,37.6) ; 55,6.7 49.4,6.7 48.3,5.6 R30.1 46.56,7.54 44.6,9.5 40.7,9.5 37.9,6.7 ; 55,6.7 60,6.7 60.84,5.86 R33.1 60.86,5.8 R32.1 R43.1 ; 55,6.7 55.06,6.64 R28.1 ; R15.1 v1(7.24,29.1) ; v1(17.4,36.2) 20.9,36.2 21.5,36.8 25.6,36.8 26.4,36 26.4,33.1 ; 37.9,6.7 32.4,6.7 31.4,5.7 R29.1 29.36,8.54 28.1,9.8 26.2,9.8 25.8,9.4 24.8,9.4 24.5,9.1 24.5,7.4 23.8,6.7 21.6,6.7 20.66,5.76 R26.1 ; 37.9,6.7 37.86,6.66 R27.1
  BOTTOM w0.508: L2.1 54.52,24.1 52.7,24.1 ; 52.7,29.5 52.7,32.64 ; 52.7,29.5 52.66,29.46 v1(49.04,29.46) 48.13,29.46 C57.1 ; 52.7,29.5 52.7,24.1 ; 52.7,32.64 v1(52.7,32.7) ; 52.7,32.64 54.76,34.7 L8.2 ; 52.7,32.64 D9.1 ; 52.7,24.1 52.7,19.8 51,18.1 51,14.9 54,11.9 54,9.4 55,8.4 66.9,8.4 68.1,7.2 68.1,3.7 67.6,3.2 65.7,3.2 64.74,4.16 R43.1 ; 52.7,24.1 51.3,24.1 48.7,21.5 44.7,21.5 41.59,24.61 v1(41.59,28.19) C53.1 40.39,28.41 38.7,30.1 37.4,30.1 36.3,31.2 34.8,31.2 ; v1(46.4,38.7) 46.41,38.71 47.52,38.71 C61.1 ; 34.8,31.2 34.8,26.1 32.6,23.9 30.5,23.9 29.57,22.97 C41.1 ; 34.8,31.2 33.44,32.56 C28.1 33.24,33.1 v1(32,33.1) 26.4,33.1 25.44,32.14 C33.2 R49.2 23.66,30.96 v1(23.6,30.9) 19.91,30.9 19.4,30.39 19.4,29.7 ; v1(27.87,20.57) 27.87,20.57 C41.1 ; C41.1 29.57,20.33 31.1,18.8 R35.1 R36.1
  vias: v1(18.5,26.2) v1(19.3,26.2) v1(20.1,27) v1(20.1,26.2)
VCC_BKUP: length 47.8
  TOP w0.508: v1(33.3,20.57) 33.3,20.57 U14.8 ; v1(51.9,30.56) 51.9,27.6 51.4,27.1 v1(36.9,27.1) ; v1(51.9,30.56) U19.22 ; v1(51.9,30.56) 57.54,30.56 62.43,25.67 U20.1 62.45,25.65 63.2,24.9
  BOTTOM w0.508: R42.2 51.6,30.86 v1(51.9,30.56) ; v1(36.9,27.1) 36.9,22.9 34.76,20.76 C48.1 v1(33.3,20.57)
VCC_BT: length 17.2
  TOP w0.508: 19.7,13.5 19.7,22.44 20.21,22.95 22.35,22.95 v1(22.9,23.5)
  BOTTOM w0.508: v1(22.9,23.5) 23.87,24.47 U18.12 23.87,26.93 C58.2
  vias: v1(19.9,13.1) v1(19.9,12.4)
VCC_IN: length 76.8
  TOP w0.28: 12.9,29.1 12.65,28.85 U3.7
  TOP w0.508: v1(28,30.4) 28,34.1 32.8,38.9 34.9,38.9 36.5,37.3 39.8,37.3 40.61,38.11 40.61,39.55 U7.1 ; 43.8,43.3 44.1,43.3 45.2,44.4 54.9,44.4 58,47.5 B1.1
  TOP w0.762: 13.6,20.6 13.9,20.3 14,20.3 14.7,19.6 14.7,16.5 13.9,15.7 D3.2
  BOTTOM w0.508: v1(25.8,15.7) v1(24.9,15.7) 19.4,15.7 17.2,13.5 v1(17.2,13.3) ; 13.2,22.6 25.6,22.6 28,25 v1(28,30.4)
  vias: v1(11.5,30.5) v1(12.1,30.5) v1(12.7,24.4) v1(12.8,30.5) v1(13.5,24.4) v1(13.5,23.6) v1(13.5,22.86) v1(13.5,22.1) v1(13.5,15.9) v1(13.5,15.2) v1(17.2,12.6) v1(30.2,11.64) v1(30.2,11) v1(43.7,42) v1(43.7,41.3) v1(43.7,40.6)
VCC_LCD: length 10.3
  TOP w0.762: U6.5 37.85,43.15 37,44 37,46.89 U15.7
  BOTTOM w0.762: C18.1 35.9,43.76 35.9,47.31 U15.7
VCC_LEDA: length 17.3
  BOTTOM w0.762: U15.5 41.32,47.38 42.7,46 44.2,46 45,45.2 45,38.7 44.2,37.9 39.6,37.9 39.41,38.09
  vias: v1(37.87,38.1) v1(38.61,38.1)
VCC_SENSOR: length 41
  TOP w0.254: 39.55,13.2 39.55,13.95 38.95,14.55 U16.13 37.65,14.55 ; 39.55,13.2 U16.2 39.55,11.55 39.75,11.35 v1(40.55,11.35) U16.4 40.55,12.95 40.3,13.2 39.55,13.2 ; 37.1,14.5 37.15,14.55 37.65,14.55 ; 37.65,14.55 37.2,14.1
  TOP w0.508: U13.8 v1(51.2,20.57) ; v1(39.8,18.3) 39.8,17.54 U10.2 U10.3 42.13,17.27 43.6,15.8 43.6,12.2 42.75,11.35 v1(40.55,11.35)
  BOTTOM w0.254: v1(40.55,11.35) 41.4,11.35 C54.2
  BOTTOM w0.508: v1(39.8,18.3) 39.8,17.65 40.31,17.14 C45.2 41.4,17.18 42.8,18.58 R38.1 ; R38.1 48.67,18.67 49.96,19.96 C52.2 50.33,20.57 v1(51.2,20.57) ; R38.1 R37.1
  vias: v1(36.4,13.24) v1(36.4,12.5)
VSSA: length 8.1
  TOP w0.254: U8.14 22.65,31.65 23.6,32.6 v1(23.6,34.4)
  BOTTOM w0.254: C32.1 23.6,33.46 v1(23.6,34.4) 23.66,34.46 R50.1
12864_CS: length 15.5
  TOP w0.254: U8.3 18.55,37.15 17.6,38.1 v1(17.6,39.2)
  BOTTOM w0.254: U15.12 22.65,46.76 21.1,46.76 18,43.65 18,39.8 17.6,39.4 v1(17.6,39.2)
12864_EN: length 40
  TOP w0.254: v1(21.4,37.6) 21.4,37.4 20.65,36.65 U8.4 ; U6.3 41,44.9 v1(43.4,44.9)
  BOTTOM w0.254: v1(21.4,37.6) 33.7,37.6 35,38.9 35,48.6 35.4,49 39.5,49 40.1,48.4 40.1,46.4 40.6,45.9 41.36,45.9 R19.1 v1(43.4,44.9)
12864_LEDA_EN: length 25.9
  TOP w0.254: v1(34.1,41.7) 36.8,41.7 37.3,42.2 40.1,42.2 U7.3 41.46,42.06 v1(42.46,42.06) ; U8.78 v1(23.05,38.85)
  BOTTOM w0.254: v1(34.1,41.7) 34.1,39.4 32.9,38.2 23.7,38.2 v1(23.05,38.85) ; v1(42.46,42.06) R20.1
12864_RESET: length 16.3
  TOP w0.254: v1(18.47,39.2) 18.47,37.91 18.72,37.65 U8.2
  BOTTOM w0.254: v1(18.47,39.2) 18.47,43.37 21.4,46.3 24.73,46.3 U15.11
12864_ROM_CS: length 46.3
  TOP w0.254: v1(29.7,36.9) 27.9,35.1 21.92,35.1 21.47,34.65 U8.8
  BOTTOM w0.254: U15.4 45.71,45.8 48.5,45.8 50.5,43.8 50.5,37.7 49.7,36.9 v1(29.7,36.9)
12864_ROM_IN: length 44.8
  TOP w0.254: v1(27,36.9) 21.6,36.9 20.85,36.15 U8.5
  BOTTOM w0.254: v1(27,36.9) 28.7,35.2 50.2,35.2 52,37 52,47.13 U15.1
12864_ROM_OUT: length 44.8
  TOP w0.254: v1(27.9,36.9) 27.1,36.1 21.51,36.1 21.06,35.65 U8.6
  BOTTOM w0.254: v1(27.9,36.9) 29.1,35.7 50,35.7 51.5,37.2 51.5,45.09 U15.2
12864_ROM_SCK: length 45.4
  TOP w0.254: v1(28.8,36.9) 27.5,35.6 21.71,35.6 21.27,35.15 U8.7
  BOTTOM w0.254: v1(28.8,36.9) 29.5,36.2 49.7,36.2 51,37.5 51,44 48.7,46.3 47.75,46.3 U15.3
12864_RS: length 16.2
  TOP w0.254: U8.1 v1(19.8,39.2)
  BOTTOM w0.254: v1(19.8,39.2) 19.8,44.05 21.55,45.8 26.77,45.8 U15.10
12864_SCL: length 16.5
  TOP w0.254: U8.79 v1(22.55,42.9)
  BOTTOM w0.254: U15.8 31.85,45.8 28.5,45.8 27.4,44.7 22.8,44.7 22.55,44.45 v1(22.55,42.9)
12864_SDA: length 15.6
  TOP w0.254: v1(21.4,42.9) 22.05,42.25 U8.80
  BOTTOM w0.254: v1(21.4,42.9) 21.4,44.8 21.8,45.2 27.1,45.2 28.2,46.3 29.81,46.3 U15.9
#RESET: length 24.9
  TOP w0.254: U8.76 24.05,43.17 J1.4 18.32,46.3 v1(10.7,46.3) 8.7,46.3 7.8,45.4 7.66,45.4
  BOTTOM w0.254: C34.2 R25.2 9.48,46.6 9.78,46.3 v1(10.7,46.3)
ADC_BAT: length 54.9
  TOP w0.254: v1(4.8,36.6) 4.8,38.8 8.8,42.8 11.8,42.8 12.8,43.8 22.7,43.8 23.55,42.95 U8.77 ; v1(4.6,26.4) 5.3,25.7 5.3,22 6.8,20.5 v1(6.8,11.7)
  BOTTOM w0.254: R6.2 7.74,11.7 v1(6.8,11.7) 5.86,11.7 R9.1 ; v1(4.6,26.4) 3.5,27.5 3.5,35.3 v1(4.8,36.6)
AT24CXX_SCL: length 14.9
  TOP w0.254: 25.55,26.4 25.55,21.35 24.9,20.7 v1(24.9,18.03) U11.6
  BOTTOM w0.254: v1(24.9,18.03) 29.57,18.03 R35.2
AT24CXX_SDA: length 16.6
  TOP w0.254: 25.05,26.4 25.05,21.55 24.2,20.7 24.2,17.5 v1(24.9,16.8) 24.94,16.76 U11.5
  BOTTOM w0.254: R36.2 29.32,16.76 24.94,16.76 v1(24.9,16.8)
BAT_#CHG: length 11.2
  TOP w0.254: v1(7.4,7) 7.5,7 10.3,4.2 10.81,4.2 11.5,3.52 D1.2 ; v1(5.1,8.7) 5.1,9.1 5.4,9.4 U2.8
  BOTTOM w0.254: v1(5.1,8.7) 6.6,8.7 7.4,7.9 v1(7.4,7)
BAT_#PG: length 12.4
  TOP w0.254: U2.5 12.7,10.4 13,10.7 15.2,10.7 15.25,10.65 15.26,10.65 15.63,10.28 15.63,10.27 15.7,10.2 15.7,8.6 13.6,6.5 D2.2
BAT_ISET2: length 54.2
  TOP w0.254: U8.56 31.85,36.15 29.4,33.7 29.4,30.7 26.7,28 21.5,28 21,27.5 21,26 20.2,25.2 16.5,25.2 15.5,24.2 15.5,14.6 11.9,11 4.4,11 4.1,10.7 4.1,9.9 ; 4.1,9.9 v1(4.1,8.7) ; 4.1,9.9 4.1,9.9 U2.7
  BOTTOM w0.254: R12.1 4.34,8.46 v1(4.1,8.7)
BEEP: length 20.8
  TOP w0.254: U8.57 40.05,36.65 41.48,38.08 43.48,38.08 46.3,40.9 v1(46.9,40.9)
  BOTTOM w0.254: R47.1 48.7,43.88 48.7,41.4 48.2,40.9 v1(46.9,40.9)
BT_EN: length 37.4
  TOP w0.254: v1(16.8,7.5) 17.25,7.95 U4.3 17.75,9.65 18.18,10.08 18.18,10.49 18.18,21.32 v1(18,21.5) ; U8.42 v1(28.95,29.15)
  BOTTOM w0.254: v1(28.95,29.15) 28.95,24.95 25.5,21.5 v1(18,21.5) ; v1(16.8,7.5) R17.1
BT_LED: length 71.3
  TOP w0.254: U8.43 35.35,29.65 v1(36.9,28.1)
  BOTTOM w0.254: v1(36.9,28.1) 36.2,27.4 36.2,24.6 32.5,20.9 32.5,16.2 33.2,15.5 33.2,14.1 ; R41.1 66.26,7.04 65.6,7.7 50.7,7.7 48.3,10.1 40.5,10.1 39.7,10.9 39.7,12.8 38.4,14.1 33.2,14.1 ; 33.2,14.1 29,14.1 28.1,15 23,15 22.37,14.37 U18.24
D+: length 17.1
  TOP w0.203: 8.46,39.23 8.01,39.69 8.01,40.53 8.27,40.79 10.44,40.79 R3.1 ; 8.46,39.23 U1.6 ; 8.46,39.23 8.44,39.23 8,38.8 8,31.3 7.31,30.61 6.08,30.61 5.96,30.49 USB1.3
D-: length 17.1
  TOP w0.203: 7.13,39.23 U1.1 ; 7.13,39.23 7.17,39.23 7.6,38.8 7.6,31.47 7.14,31.02 6.08,31.02 5.96,31.14 USB1.2 ; 7.13,39.23 7.6,39.7 7.6,40.7 8.1,41.2 10.4,41.2 11.2,42 R4.1
DM: length 21.1
  TOP w0.203: R4.2 C2.2 14.5,42 15.3,41.2 19.8,41.2 22.79,38.21 29.75,38.21 30.34,38.8 30.34,39.18 30.05,39.47 U8.64
DP: length 25
  TOP w0.203: U8.62 31.05,39.47 30.75,39.18 30.75,38.63 29.92,37.8 22.63,37.8 19.63,40.8 15.3,40.8 14.5,40 C1.2 ; C1.2 R3.2 ; C1.2 R2.1 R1.2
GPS_PPS: length 93.9
  TOP w0.254: v1(54.8,13.5) 54.8,8.8 55.6,8 66.4,8 68.2,6.2 68.2,2.8 66.94,1.54 D8.2 ; v1(61.1,30.5) 61.02,30.5 61,30.52 ; 61,30.52 U19.3 ; 61,30.52 59.18,30.52 57.8,31.9 54.4,31.9 53.6,32.7 53.6,42.85 53.33,43.11 49.11,43.11 48.7,42.7 48.7,40.7 47.5,39.5 46.3,39.5 45.77,38.96 45.77,36.97 44.33,35.53 41.47,35.53 40.9,36.1 36,36.1 35.55,35.65 U8.55
  BOTTOM w0.254: v1(54.8,13.5) 55.5,14.2 55.5,20.1 56,20.6 60,20.6 60.9,21.5 61.8,21.5 62.3,22 62.3,29.3 v1(61.1,30.5)
GPS_SCL: length 2.7
  TOP w0.254: U19.19 48.72,35.78 48.33,36.17 U22.6
GPS_SDA: length 7.1
  TOP w0.254: U22.5 48.92,34.9 48.92,34.9 51.5,34.9 51.9,35.3 51.9,36.6 51.62,36.88 U19.18
IIC1_SCL: length 42.3
  TOP w0.254: U16.1 39.05,11.15 39.5,10.7 45,10.7 45.7,11.4 45.7,18.7 45.1,19.3 U13.2 44,19.3 42,21.3 v1(39.53,21.3) ; 28.05,26.4 28.05,24.05 28.8,23.3 37.53,23.3 v1(39.53,21.3) ; v1(39.53,21.3) U10.5
  BOTTOM w0.254: v1(39.53,21.3) 39.53,20.42 R38.2
IIC1_SDA: length 45.9
  TOP w0.254: U10.6 v1(38.03,21.6) 36.83,22.8 28.4,22.8 27.55,23.65 27.55,26.4 ; v1(41.3,22.1) 42.5,22.1 44.03,20.57 U13.1 45.13,20.57 46.2,19.5 46.2,11.1 45.3,10.2 39.2,10.2 38.3,11.1 U16.16
  BOTTOM w0.254: v1(38.03,21.6) 38.53,22.1 v1(41.3,22.1) 41.27,22.07 R37.2
NRF24L01_CE: length 32.8
  TOP w0.254: U12.1 55.53,21.27 50.5,26.3 34.6,26.3 32.31,28.59 29.89,28.59 29.05,27.75 29.05,26.4
NRF24L01_CSN: length 32.2
  TOP w0.254: U12.2 55.03,19.17 54.5,19.7 54.5,21.59 50.29,25.8 34.39,25.8 32.11,28.09 30.09,28.09 29.55,27.54 29.55,26.4
NRF24L01_IRQ: length 35.1
  TOP w0.254: U12.6 52.93,16.67 52,17.6 52,20.88 49.08,23.8 29.2,23.8 28.55,24.45 28.55,26.4
NRF24L01_MISO: length 31.8
  TOP w0.254: 30.55,26.4 30.55,24.95 31.2,24.3 49.4,24.3 52.5,21.2 52.5,17.8 53.1,17.2 54.7,17.2 55.17,17.67 U12.5
NRF24L01_MOSI: length 32.5
  TOP w0.254: v1(54,19.3) 54,21.39 50.09,25.3 34.19,25.3 31.9,27.59 30.3,27.59 30.05,27.33 30.05,26.4 ; U12.4 55.49,18.13 54.13,18.13 v1(54,18)
  BOTTOM w0.254: v1(54,18) v1(54,19.3)
NRF24L01_SCK: length 29.9
  TOP w0.254: 31.05,26.4 31.05,25.16 31.41,24.8 49.61,24.8 53,21.41 53,18.92 53.25,18.67 53.43,18.67 53.44,18.66 54.26,18.66 54.27,18.67 U12.3
P1.0: length 32.2
  TOP w0.254: v1(9.3,37) v1(9.3,33.6) ; v1(21.6,24.8) 22.05,25.25 22.05,26.4
  BOTTOM w0.254: v1(9.3,33.6) 10.3,32.6 12.9,32.6 15.1,30.4 15.1,25.4 15.7,24.8 v1(21.6,24.8) ; R31.2 13.06,43.56 9.3,39.8 v1(9.3,37)
P1.1: length 31.2
  TOP w0.254: 22.55,26.4 22.55,24.79 21.85,24.1 19.3,24.1 18.64,23.44 18.64,3.52 SW1.2
  BOTTOM w0.203: SW1.2 19.14,4.03 C36.1 R26.2
P1.2: length 43.3
  TOP w0.254: SW2.2 34.27,3.2 28.1,3.2 24.2,7.1 20,7.1 19.09,8.01 19.09,23.09 19.6,23.6 22,23.6 23.05,24.65 23.05,26.4
  BOTTOM w0.203: R27.2 C37.1 36.34,3.95 SW2.2
P1.3: length 51.9
  TOP w0.254: 23.55,26.4 23.55,21.65 22.7,20.8 22.7,15 28.5,9.2 28.5,7 29.6,5.9 31.7,5.9 32.4,6.6 41.5,6.6 45,3.1 51.51,3.1 SW3.2
  BOTTOM w0.203: SW3.2 53.54,4.01 C38.1 R28.2
P1.4: length 53.7
  TOP w0.254: SW4.2 26.15,1.3 16.5,1.3 14.8,3 14.8,6.9 16.2,8.3 16.2,10.4 15.1,11.5 15.1,13.5 16.3,14.7 16.3,24.2 16.7,24.6 20.3,24.6 21.5,25.8 21.5,27.29 21.75,27.54 23.86,27.54 24.05,27.35 24.05,26.4
  BOTTOM w0.203: SW4.1 27.84,6.35 R29.2 C39.1 27.84,2.99 SW4.2
P1.5: length 43.5
  TOP w0.254: SW5.1 42.68,7.1 33.8,7.1 31.5,9.4 29,9.4 23.4,15 23.4,20.7 24.55,21.85 24.55,26.4
  BOTTOM w0.203: SW5.1 45.04,6.34 R30.2 C40.1 45.04,2.84 43.6,1.4 43.58,1.4 43.48,1.5
P4.6: length 56.6
  TOP w0.254: v1(32.1,34.4) 32.35,34.65 U8.53 ; D5.2 60.54,1.54 59.9,0.9 56.1,0.9 54.3,2.7 54.3,12.4 52.8,13.9 49.3,13.9 48,15.2 v1(48,23.1)
  BOTTOM w0.254: v1(48,23.1) 48,25.95 39.55,34.4 v1(32.1,34.4)
P4.7: length 61.3
  TOP w0.254: v1(31.1,34.4) 31.85,35.15 U8.54 ; D6.2 62.82,1.52 61.7,0.4 55.8,0.4 53.8,2.4 53.8,12.1 52.57,13.33 49.07,13.33 47.5,14.9 47.5,22.7 47.19,23.01 v1(47.19,23.1)
  BOTTOM w0.254: v1(47.19,23.1) 47.19,26.01 39.44,33.77 31.73,33.77 v1(31.1,34.4)
PCF8563_#INT: length 34.3
  TOP w0.254: U14.3 28.93,18.03 28.2,17.3 28.2,13.7 29.5,12.4 34.5,12.4 35,12.9 35,15.4 36,16.4 36,21.3 35,22.3 28.1,22.3 27.05,23.35 27.05,26.4
PCF8563_SCL: length 16.4
  TOP w0.254: 26.55,26.4 26.55,23.05 27.8,21.8 31.6,21.8 32.63,20.77 32.63,18.7 v1(33.3,18.03) U14.6
  BOTTOM w0.254: R40.2 34.72,18.03 v1(33.3,18.03)
PCF8563_SDA: length 17.8
  TOP w0.254: U14.5 v1(33.3,16.76) 32.1,17.96 32.1,20.3 31.1,21.3 27.6,21.3 26.05,22.85 26.05,26.4
  BOTTOM w0.254: R39.2 34.53,16.76 v1(33.3,16.76)
SENSOR_EN: length 28.3
  TOP w0.254: U8.44 35.96,30.15 v1(37.61,28.5) ; v1(37,21.6) 36.5,21.1 36.5,16.2 35.5,15.2 35.5,10.05 35.1,9.65 ; 35.1,9.65 U5.3 ; 35.1,9.65 v1(35.1,8.6)
  BOTTOM w0.254: v1(35.1,8.6) 34.1,9.6 R16.1 ; v1(37.61,28.5) 37.6,28.5 37.6,22.2 v1(37,21.6)
TEST: length 14.6
  TOP w0.254: J1.3 18.18,48.7 20.3,48.7 20.9,48.1 20.9,46.99 26.55,41.35 U8.71
UCA0RXD: length 34.4
  TOP w0.254: U8.41 34,28.45 v1(34,27.9)
  BOTTOM w0.254: v1(34,27.9) 34,26.13 32.67,24.8 30.3,24.8 25.8,20.3 12,20.3 7.37,24.93 U18.1
UCA0TXD: length 29.8
  TOP w0.254: 31.55,26.4 31.55,25.75 31.8,25.5 v1(32.3,25.5)
  BOTTOM w0.254: U18.2 8.87,24.33 12.4,20.8 25.6,20.8 30.3,25.5 v1(32.3,25.5)
UCA1RXD: length 5.2
  TOP w0.254: U8.52 37.45,34.15 38.48,35.18 R45.2
UCA1TXD: length 4.8
  TOP w0.254: R44.2 38.6,33.65 U8.51
USB_PUR: length 17.8
  TOP w0.254: v1(16.9,38.5) R2.2 ; U8.63 v1(30.55,41.75)
  BOTTOM w0.254: v1(16.9,38.5) 20.4,38.5 24.3,42.4 29.9,42.4 30.55,41.75 v1(30.55,41.75)
W25QXX_#CS: length 14.6
  TOP w0.203: U17.1 44.71,28.19 42.81,30.09 37.65,30.09 37.08,30.65 U8.45
W25QXX_SPI_CLK: length 6.4
  TOP w0.254: v1(36.7,32.3) 36.55,32.15 U8.48 ; v1(38,30.9) 38.1,30.8 39.41,30.8 U17.6
  BOTTOM w0.254: v1(38,30.9) 36.7,32.2 v1(36.7,32.3)
W25QXX_SPI_MISO: length 15.4
  TOP w0.254: U17.2 46.14,29.46 42.9,32.7 38.1,32.7 37.05,31.65 U8.47
W25QXX_SPI_MOSI: length 6
  TOP w0.254: U17.5 38.1,32 37.25,31.15 U8.46
XIN: length 8.1
  TOP w0.254: C29.2 14.6,36.34 14.6,34.55 X2.2 14.85,33.85 16.05,32.65 U8.12
XOUT: length 10.8
  TOP w0.254: C30.2 12.6,36.34 12.6,34.55 X2.1 12.35,33.95 13.4,32.9 15,32.9 15.75,32.15 U8.13
XT2IN: length 9.6
  TOP w0.254: C25.2 R21.1 31.25,43.31 30.73,43.82 ; 30.73,43.82 29.52,43.82 27.55,41.85 U8.69 ; 30.73,43.82 X1.2
XT2OUT: length 12.5
  TOP w0.254: C26.2 R21.2 31.8,45.8 28.3,45.8 26.93,44.43 X1.1 27.05,43.95 U8.70
N16975: length 10.2
  TOP w0.254: U14.1 30.73,20.57 31.2,20.1 31.2,17.1 32.4,15.9 v1(32.4,15) 33.2,15 33.51,14.69 X4.1
  BOTTOM w0.254: C47.1 v1(32.4,15)
N20495: length 4.2
  TOP w0.254: U12.16 v1(58.53,23.87)
  BOTTOM w0.254: v1(58.53,23.87) 59.51,23.87 R34.1
N20883: length 6.4
  TOP w0.254: U12.9 58.03,15.13 57.82,14.92 R51.2 57.7,14.76 C63.2 56.81,12.61 X5.2
N20890: length 6.7
  TOP w0.254: X5.1 60.61,10.89 60.5,11.01 60.5,12.46 C64.2 59.47,14.76 R51.1 58.53,15.7 U12.10
N21363: length 16.9
  TOP w0.254: U12.15 v1(59.53,21.37) ; 57.2,21.6 57.03,21.43 U12.19 ; U12.18 57.53,21.43 57.8,21.7 ; U12.7 57.03,16.13 56.4,15.5 53.8,15.5 v1(53.7,15.6)
  BOTTOM w0.254: C42.1 54.9,21.15 54.9,17.9 53.7,16.7 C49.2 53.7,16.66 v1(53.7,15.6) ; v1(59.53,21.37) 59.53,22.39 C43.2
  vias: v1(57.5,22.8) v1(57.5,22.1)
N22760: length 1.8
  TOP w0.254: U12.13 60.83,18.67 L4.2
N22769: length 1.9
  TOP w0.254: L4.1 60.57,18.17 U12.12
N22838: length 9.4
  TOP w0.254: 59.53,17.47 U12.11
  TOP w0.508: 59.53,17.47 59.53,16.67 61.72,14.48 C51.2 C50.2 L5.2
N49336: length 2.9
  TOP w0.254: U8.20 v1(21.2,28.65)
  BOTTOM w0.254: C31.1 22.2,29.64 22.2,29.6 21.25,28.65 v1(21.2,28.65)
N50234: length 4
  TOP w0.254: U8.67 28.55,39.15 v1(28.3,38.9)
  BOTTOM w0.254: v1(28.3,38.9) 27.6,38.9 27.14,39.36 C23.2
N138675: length 11.1
  TOP w0.254: R44.1 40.19,33.6 43.4,33.6 44.3,32.7 48.69,32.7 49.72,31.66 U19.21
N138679: length 11.3
  TOP w0.254: U19.20 50.04,32.76 49.6,33.2 44.6,33.2 43.7,34.1 41.21,34.1 R45.1
N211268: length 3.2
  TOP w0.254: v1(29.3,38.9) 29.05,39.15 U8.66
  BOTTOM w0.254: C24.2 29.3,40.24 v1(29.3,38.9)
N213516: length 9
  TOP w0.762: L6.1 65.79,41.21 66.61,40.39 C59.2 ; L6.1 IPX1.1 ; L6.1 65.23,41.26 U19.11
N13728785: length 5.3
  TOP w0.254: v1(15,9.2) 14.7,8.9 U2.2
  BOTTOM w0.254: v1(15,9.2) 14.9,9.2 14.07,10.03 R10.1
N13728792: length 6
  TOP w0.254: U2.4 14.89,9.9 v1(15,10.01)
  BOTTOM w0.254: R11.1 14.1,11.6 15,10.7 v1(15,10.01)
N13730609: length 2.4
  TOP w0.254: U3.1 v1(10.35,30.45)
  BOTTOM w0.254: v1(10.35,30.45) 10.74,30.84 R14.2
N13730742: length 2.8
  TOP w0.254: 13.05,28.35 13.55,28.35 13.8,28.6 ; 13.05,28.35 13.6,28.9 ; 13.05,28.35 U3.6
N13730860: length 4.2
  TOP w0.254: U3.2 9.05,28.85 v1(8.8,29.1)
  BOTTOM w0.254: R18.1 R15.2 8.76,29.14 v1(8.8,29.1)
N13731687: length 5
  TOP w0.254: D2.1 v1(14.9,1.48)
  BOTTOM w0.254: R8.1 13.84,2.12 14.48,1.48 v1(14.9,1.48)
N13731822: length 4.5
  TOP w0.254: D1.1 v1(10.3,1.48)
  BOTTOM w0.254: v1(10.3,1.48) 10.79,1.98 R7.1
N16749524: length 2.2
  TOP w0.203: U1.5 v1(10.1,38.6)
  BOTTOM w0.254: R5.1 v1(10.1,38.6)
N16751988: length 14
  TOP w0.254: 7.66,43.5 v1(7.66,42.6) 7.6,42.6 6.78,41.78 SW6.1 3.3,41.3 2.8,40.8 2.8,37.4 3.3,36.9 SW6.2
  BOTTOM w0.254: v1(7.66,42.6) 7.66,44.75 7.84,44.92 R24.2
N16752139: length 3.4
  TOP w0.254: 10.37,43.5 v1(9.3,43.5)
  BOTTOM w0.254: v1(9.3,43.5) 11.44,43.5 R31.1
N16756953: length 4
  TOP w0.254: v1(18.3,35.5) 18.3,34.5 18.65,34.15 U8.9
  BOTTOM w0.254: v1(18.3,35.5) 18.3,34.74 C27.1
N16761282: length 2.9
  TOP w0.254: D5.1 v1(59.52,3.58)
  BOTTOM w0.254: v1(59.52,3.58) 60.11,3.58 R32.2
N16761286: length 4.6
  TOP w0.254: D6.1 v1(62.82,6.88)
  BOTTOM w0.254: R33.2 62.82,6.26 v1(62.82,6.88)
N16762618: length 3.1
  TOP w0.254: U16.8 40.75,14.55 v1(40.2,14)
  BOTTOM w0.254: C56.1 39.36,14.25 39.62,14 v1(40.2,14)
N16762626: length 3.8
  TOP w0.254: U16.12 v1(36.6,15.3)
  BOTTOM w0.254: C56.2 37.64,15.3 v1(36.6,15.3)
N16762634: length 2.9
  TOP w0.254: U16.10 v1(40.05,16.2)
  BOTTOM w0.254: v1(40.05,16.2) 40.05,16.2 40.66,16.2 41.56,15.3 C55.1
N16777984: length 2.3
  TOP w0.254: U5.4 36.42,9.65 36.17,9.4 v1(36.17,8.6)
  BOTTOM w0.254: v1(36.17,8.6) 36.17,9.37 C12.1
N16778902: length 2.9
  TOP w0.254: v1(39.82,45.05) U6.4
  BOTTOM w0.254: C19.1 38.81,45.05 v1(39.82,45.05)
N16779252: length 3
  TOP w0.254: U7.4 v1(39.8,41.45)
  BOTTOM w0.254: C22.1 39.11,41.45 v1(39.8,41.45)
N16779614: length 3.2
  TOP w0.254: U4.4 19.95,8.85 20.24,8.56 v1(21.14,8.56)
  BOTTOM w0.254: C13.1 v1(21.14,8.56)
N16780565: length 4.4
  TOP w0.254: D7.1 v1(64.85,6.85)
  BOTTOM w0.254: R41.2 64.85,5.91 v1(64.85,6.85)
N16782209: length 2.7
  TOP w0.254: v1(67.3,4.8) 67.3,3.9 66.97,3.58 D8.1
  BOTTOM w0.254: v1(67.3,4.8) 66.76,4.8 R43.2
N16782513: length 1.8
  BOTTOM w0.508: R42.1 46.48,32.51 D9.2
N16783927: length 4.3
  TOP w0.762: U19.9 U19.8 63.74,37.96 64.24,37.46 64.24,37.46 64.58,37.12 64.58,37.12 65.06,36.64 R46.2
N16783979: length 1.5
  TOP w0.762: R46.1 L6.2
N16784737: length 2
  TOP w0.762: C60.1 ANT2.1
N16784761: length 1.7
  TOP w0.762: L7.1 C60.2
N16784764: length 0.8
  TOP w0.203: 71.8,41.4 71.79,41.39 U21.3
